# EAGLE board Blackberry_Trackballer_Breakout_Panel_v13 (EAGLE 7.2.0), part 1 of 3
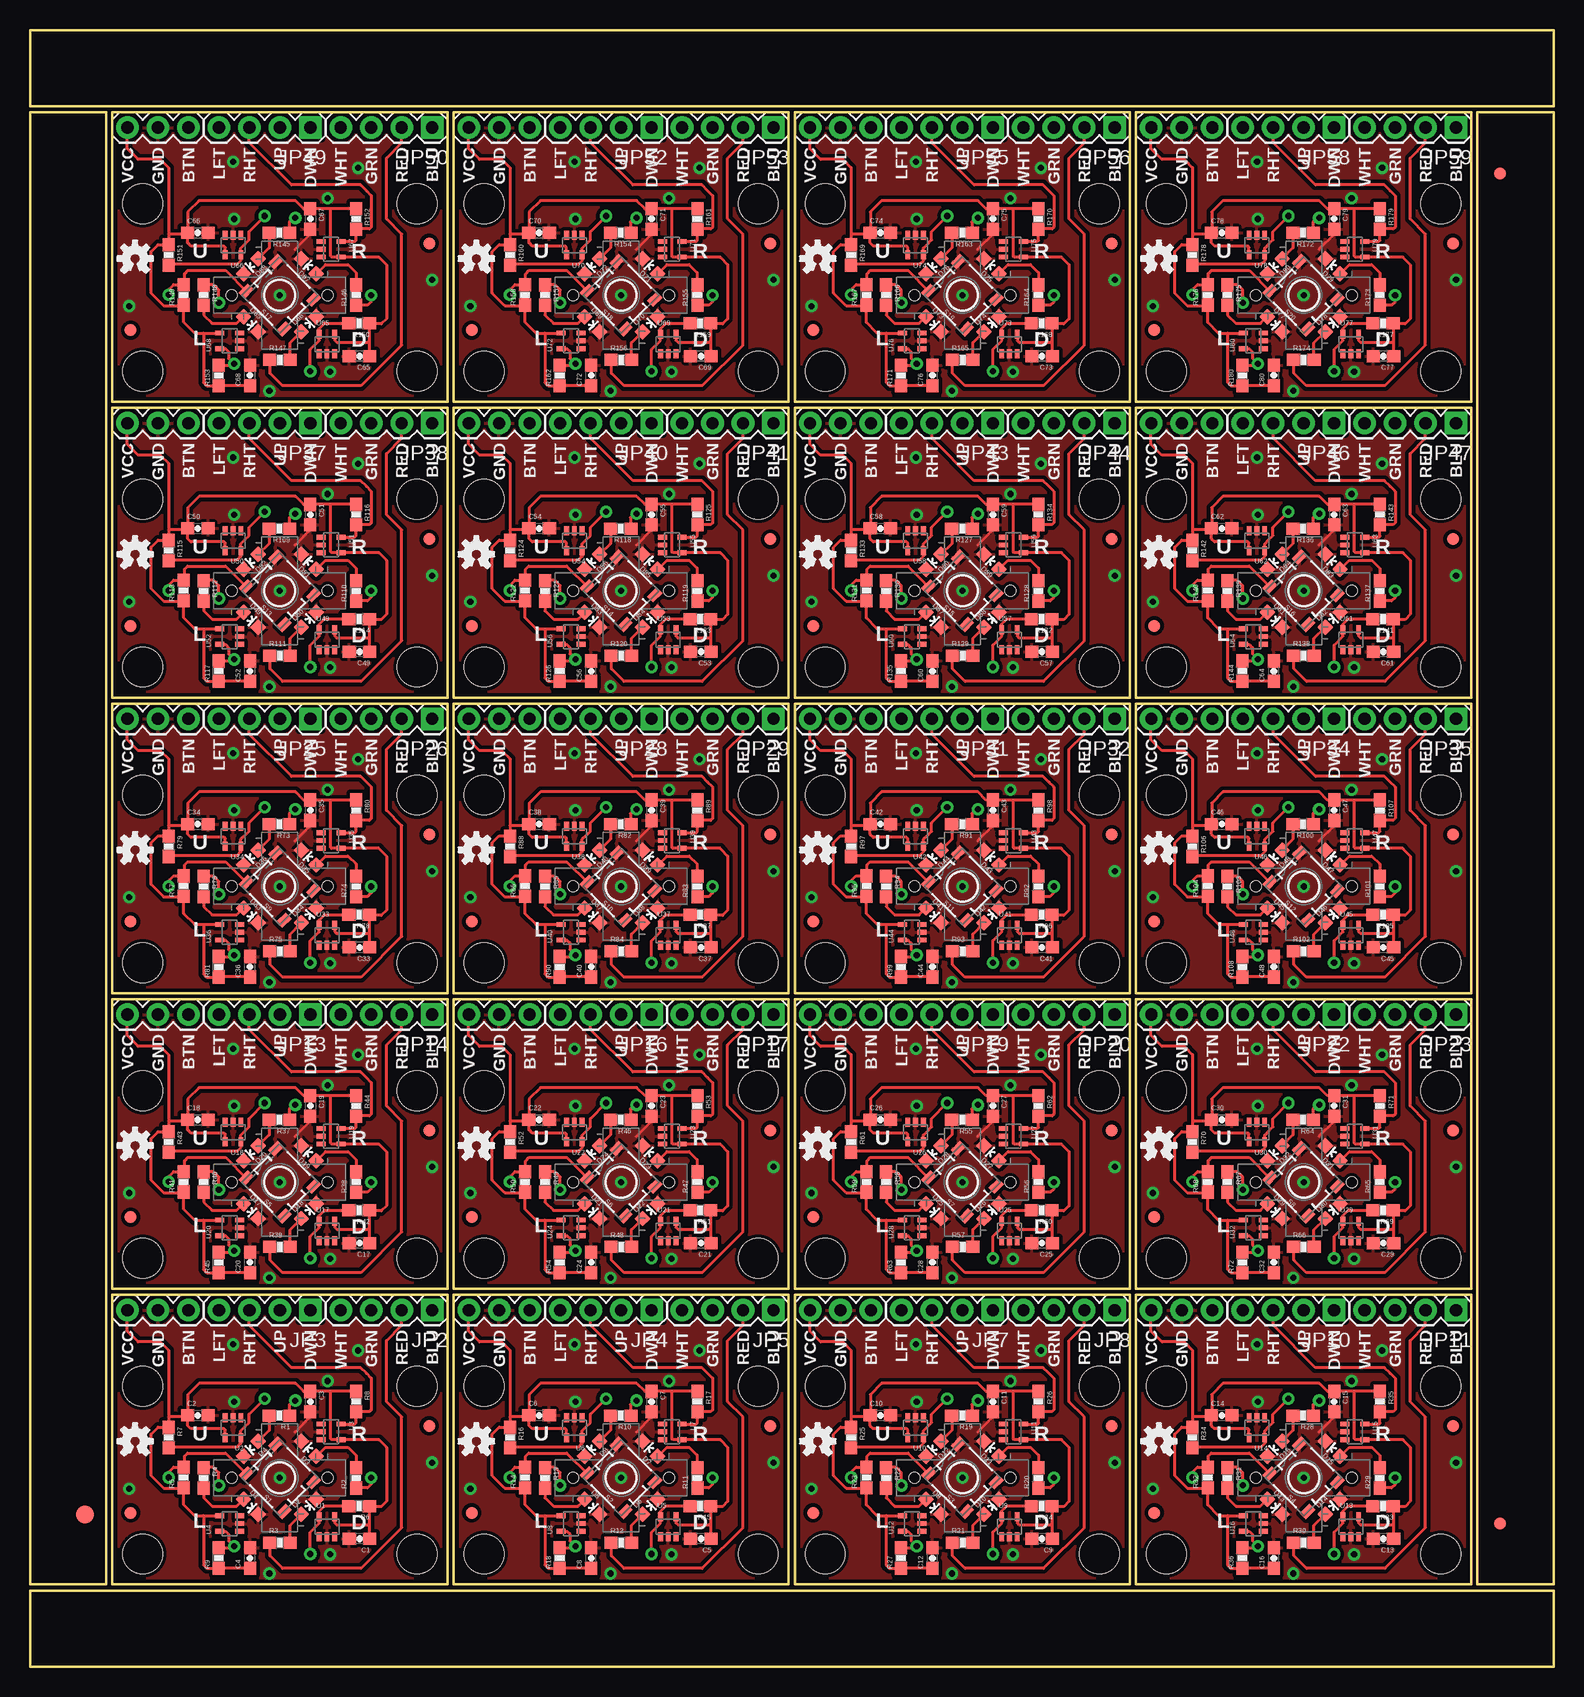
[diagram p0: board, top side]
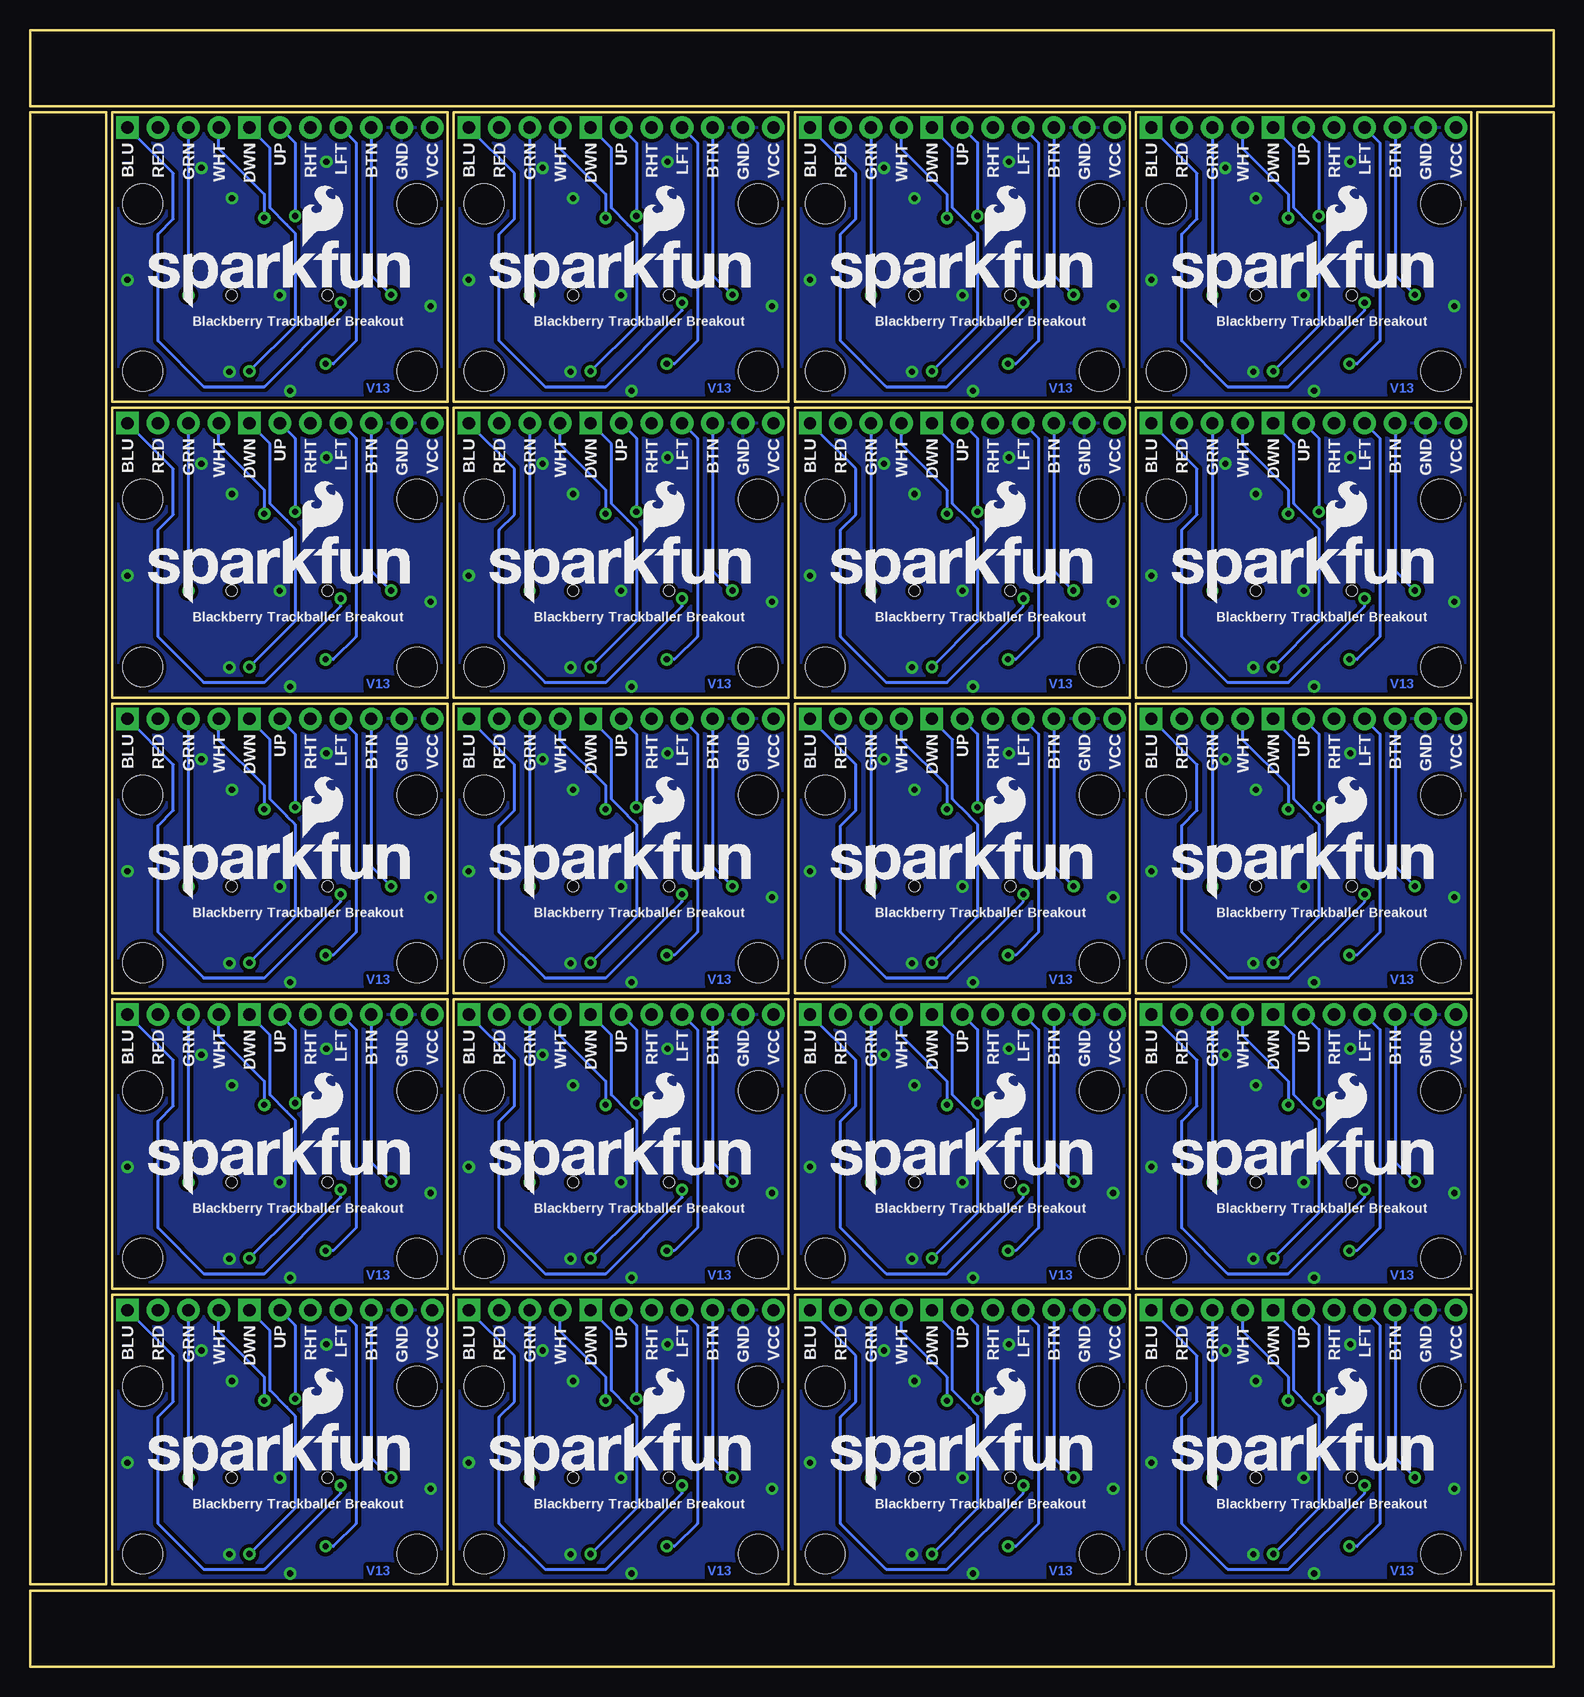
[diagram p1: board, bottom side, seen from below]

Size 127 x 136.4 mm. Coordinates in mm from the lower left corner, seen from the top.
Outline: 34.8,30.99 6.86,30.99 6.86,6.86 34.8,6.86 34.8,30.99
Outline: 63.25,30.99 35.31,30.99 35.31,6.86 63.25,6.86 63.25,30.99
Outline: 91.69,30.99 63.75,30.99 63.75,6.86 91.69,6.86 91.69,30.99
Outline: 120.14,30.99 92.2,30.99 92.2,6.86 120.14,6.86 120.14,30.99
Outline: 34.8,55.63 6.86,55.63 6.86,31.5 34.8,31.5 34.8,55.63
Outline: 63.25,55.63 35.31,55.63 35.31,31.5 63.25,31.5 63.25,55.63
Outline: 91.69,55.63 63.75,55.63 63.75,31.5 91.69,31.5 91.69,55.63
Outline: 120.14,55.63 92.2,55.63 92.2,31.5 120.14,31.5 120.14,55.63
Outline: 34.8,80.26 6.86,80.26 6.86,56.13 34.8,56.13 34.8,80.26
Outline: 63.25,80.26 35.31,80.26 35.31,56.13 63.25,56.13 63.25,80.26
Outline: 91.69,80.26 63.75,80.26 63.75,56.13 91.69,56.13 91.69,80.26
Outline: 120.14,80.26 92.2,80.26 92.2,56.13 120.14,56.13 120.14,80.26
Outline: 34.8,104.9 6.86,104.9 6.86,80.77 34.8,80.77 34.8,104.9
Outline: 63.25,104.9 35.31,104.9 35.31,80.77 63.25,80.77 63.25,104.9
Outline: 91.69,104.9 63.75,104.9 63.75,80.77 91.69,80.77 91.69,104.9
Outline: 120.14,104.9 92.2,104.9 92.2,80.77 120.14,80.77 120.14,104.9
Outline: 34.8,129.54 6.86,129.54 6.86,105.41 34.8,105.41 34.8,129.54
Outline: 63.25,129.54 35.31,129.54 35.31,105.41 63.25,105.41 63.25,129.54
Outline: 91.69,129.54 63.75,129.54 63.75,105.41 91.69,105.41 91.69,129.54
Outline: 120.14,129.54 92.2,129.54 92.2,105.41 120.14,105.41 120.14,129.54
Outline: 6.35,6.86 6.35,129.54 0,129.54 0,6.86 6.35,6.86
Outline: 0,0 127,0 127,6.35 0,6.35 0,0
Outline: 127,6.86 127,129.54 120.65,129.54 120.65,6.86 127,6.86
Outline: 127,136.4 0,136.4 0,130.05 127,130.05 127,136.4
Copper layers (1*16): Top 0.035mm / dielectric 1.5mm / Bottom 0.035mm
Design rules "SparkFun-2-layer": minimum track width 7mil, minimum drill 15mil, track to track 8mil, track to pad 8mil, pad to pad 8mil, via to via 8mil, smd to smd 8mil, copper to edge 8mil, drill to drill 8mil, minimum pad ring 12mil, minimum via ring 10mil, stop-mask expansion 4mil, vias tented up to drill 20mil, thermal gap 10mil
Net classes: 0 default: width 0.203 mm; 1 power: width 0.203 mm

## Footprints (pad centres in the part's own frame; a part is rotated, then mirrored left to right if it is on the bottom)
0603-CAP = smd 1.1 x 1: 1 -0.85,0; 2 0.85,0
LED-0603 = smd 1 x 1: A 0,-0.877; C 0,0.877
FIDUCIAL-1X2 = smd 1 x 1: 1 0,0
FIDUCIAL-1.5X3 = smd 1.5 x 1.5: 1 0,0
1X03 = drill 1.016 pad 1.88: 1 0,0; 2 2.54,0; 3 5.08,0
1X04 = drill 1.016 pad 1.88 square: 1 0,0 | drill 1.016 pad 1.88: 2 2.54,0; 3 5.08,0; 4 7.62,0
0603-RES = smd 1.1 x 1: 1 -0.85,0; 2 0.85,0
TACTILE_SWITCH_SMD-2 = smd 0.7 x 1.1: 1 2.225,1.75; 2 2.225,-1.75; 3 -2.225,-1.75; 4 -2.225,1.75
SC70 = smd 0.4 x 0.75: 1 -0.65,-0.825; 2 0,-0.825; 3 0.65,-0.825; 4 0.65,0.825; 5 -0.65,0.825
STAND-OFF = hole 3.302: 0,0
TRACKBALL = hole 0.9: -4,0; 4,0

## Placement (x,y rotation side)
C1  0.1uF  [0603-CAP]  27.47,10.67 180 top
C2  0.1uF  [0603-CAP]  13.99,20.95 0 top
C3  0.1uF  [0603-CAP]  23.37,22.1 270 top
C4  0.1uF  [0603-CAP]  18.34,9.06 90 top
C5  0.1uF  [0603-CAP]  55.92,10.67 180 top
C6  0.1uF  [0603-CAP]  42.44,20.95 0 top
C7  0.1uF  [0603-CAP]  51.82,22.1 270 top
C8  0.1uF  [0603-CAP]  46.79,9.06 90 top
C9  0.1uF  [0603-CAP]  84.37,10.67 180 top
C10  0.1uF  [0603-CAP]  70.89,20.95 0 top
C11  0.1uF  [0603-CAP]  80.26,22.1 270 top
C12  0.1uF  [0603-CAP]  75.24,9.06 90 top
C13  0.1uF  [0603-CAP]  112.82,10.67 180 top
C14  0.1uF  [0603-CAP]  99.34,20.95 0 top
C15  0.1uF  [0603-CAP]  108.71,22.1 270 top
C16  0.1uF  [0603-CAP]  103.68,9.06 90 top
C17  0.1uF  [0603-CAP]  27.47,35.31 180 top
C18  0.1uF  [0603-CAP]  13.99,45.58 0 top
C19  0.1uF  [0603-CAP]  23.37,46.74 270 top
C20  0.1uF  [0603-CAP]  18.34,33.7 90 top
C21  0.1uF  [0603-CAP]  55.92,35.31 180 top
C22  0.1uF  [0603-CAP]  42.44,45.58 0 top
C23  0.1uF  [0603-CAP]  51.82,46.74 270 top
C24  0.1uF  [0603-CAP]  46.79,33.7 90 top
C25  0.1uF  [0603-CAP]  84.37,35.31 180 top
C26  0.1uF  [0603-CAP]  70.89,45.58 0 top
C27  0.1uF  [0603-CAP]  80.26,46.74 270 top
C28  0.1uF  [0603-CAP]  75.24,33.7 90 top
C29  0.1uF  [0603-CAP]  112.82,35.31 180 top
C30  0.1uF  [0603-CAP]  99.34,45.58 0 top
C31  0.1uF  [0603-CAP]  108.71,46.74 270 top
C32  0.1uF  [0603-CAP]  103.68,33.7 90 top
C33  0.1uF  [0603-CAP]  27.47,59.94 180 top
C34  0.1uF  [0603-CAP]  13.99,70.22 0 top
C35  0.1uF  [0603-CAP]  23.37,71.37 270 top
C36  0.1uF  [0603-CAP]  18.34,58.33 90 top
C37  0.1uF  [0603-CAP]  55.92,59.94 180 top
C38  0.1uF  [0603-CAP]  42.44,70.22 0 top
C39  0.1uF  [0603-CAP]  51.82,71.37 270 top
C40  0.1uF  [0603-CAP]  46.79,58.33 90 top
C41  0.1uF  [0603-CAP]  84.37,59.94 180 top
C42  0.1uF  [0603-CAP]  70.89,70.22 0 top
C43  0.1uF  [0603-CAP]  80.26,71.37 270 top
C44  0.1uF  [0603-CAP]  75.24,58.33 90 top
C45  0.1uF  [0603-CAP]  112.82,59.94 180 top
C46  0.1uF  [0603-CAP]  99.34,70.22 0 top
C47  0.1uF  [0603-CAP]  108.71,71.37 270 top
C48  0.1uF  [0603-CAP]  103.68,58.33 90 top
C49  0.1uF  [0603-CAP]  27.47,84.58 180 top
C50  0.1uF  [0603-CAP]  13.99,94.86 0 top
C51  0.1uF  [0603-CAP]  23.37,96.01 270 top
C52  0.1uF  [0603-CAP]  18.34,82.97 90 top
C53  0.1uF  [0603-CAP]  55.92,84.58 180 top
C54  0.1uF  [0603-CAP]  42.44,94.86 0 top
C55  0.1uF  [0603-CAP]  51.82,96.01 270 top
C56  0.1uF  [0603-CAP]  46.79,82.97 90 top
C57  0.1uF  [0603-CAP]  84.37,84.58 180 top
C58  0.1uF  [0603-CAP]  70.89,94.86 0 top
C59  0.1uF  [0603-CAP]  80.26,96.01 270 top
C60  0.1uF  [0603-CAP]  75.24,82.97 90 top
C61  0.1uF  [0603-CAP]  112.82,84.58 180 top
C62  0.1uF  [0603-CAP]  99.34,94.86 0 top
C63  0.1uF  [0603-CAP]  108.71,96.01 270 top
C64  0.1uF  [0603-CAP]  103.68,82.97 90 top
C65  0.1uF  [0603-CAP]  27.47,109.22 180 top
C66  0.1uF  [0603-CAP]  13.99,119.5 0 top
C67  0.1uF  [0603-CAP]  23.37,120.65 270 top
C68  0.1uF  [0603-CAP]  18.34,107.61 90 top
C69  0.1uF  [0603-CAP]  55.92,109.22 180 top
C70  0.1uF  [0603-CAP]  42.44,119.5 0 top
C71  0.1uF  [0603-CAP]  51.82,120.65 270 top
C72  0.1uF  [0603-CAP]  46.79,107.61 90 top
C73  0.1uF  [0603-CAP]  84.37,109.22 180 top
C74  0.1uF  [0603-CAP]  70.89,119.5 0 top
C75  0.1uF  [0603-CAP]  80.26,120.65 270 top
C76  0.1uF  [0603-CAP]  75.24,107.61 90 top
C77  0.1uF  [0603-CAP]  112.82,109.22 180 top
C78  0.1uF  [0603-CAP]  99.34,119.5 0 top
C79  0.1uF  [0603-CAP]  108.71,120.65 270 top
C80  0.1uF  [0603-CAP]  103.68,107.61 90 top
D1  BLU  [LED-0603]  18.41,13.34 225 top
D2  RED  [LED-0603]  23.24,13.34 315 top
D3  GRN  [LED-0603]  23.24,18.16 45 top
D4  WHT  [LED-0603]  18.41,18.16 135 top
D5  BLU  [LED-0603]  46.86,13.34 225 top
D6  RED  [LED-0603]  51.69,13.34 315 top
D7  GRN  [LED-0603]  51.69,18.16 45 top
D8  WHT  [LED-0603]  46.86,18.16 135 top
D9  BLU  [LED-0603]  75.31,13.34 225 top
D10  RED  [LED-0603]  80.14,13.34 315 top
D11  GRN  [LED-0603]  80.14,18.16 45 top
D12  WHT  [LED-0603]  75.31,18.16 135 top
D13  BLU  [LED-0603]  103.76,13.34 225 top
D14  RED  [LED-0603]  108.58,13.34 315 top
D15  GRN  [LED-0603]  108.58,18.16 45 top
D16  WHT  [LED-0603]  103.76,18.16 135 top
D17  BLU  [LED-0603]  18.41,37.97 225 top
D18  RED  [LED-0603]  23.24,37.97 315 top
D19  GRN  [LED-0603]  23.24,42.8 45 top
D20  WHT  [LED-0603]  18.41,42.8 135 top
D21  BLU  [LED-0603]  46.86,37.97 225 top
D22  RED  [LED-0603]  51.69,37.97 315 top
D23  GRN  [LED-0603]  51.69,42.8 45 top
D24  WHT  [LED-0603]  46.86,42.8 135 top
D25  BLU  [LED-0603]  75.31,37.97 225 top
D26  RED  [LED-0603]  80.14,37.97 315 top
D27  GRN  [LED-0603]  80.14,42.8 45 top
D28  WHT  [LED-0603]  75.31,42.8 135 top
D29  BLU  [LED-0603]  103.76,37.97 225 top
D30  RED  [LED-0603]  108.58,37.97 315 top
D31  GRN  [LED-0603]  108.58,42.8 45 top
D32  WHT  [LED-0603]  103.76,42.8 135 top
D33  BLU  [LED-0603]  18.41,62.61 225 top
D34  RED  [LED-0603]  23.24,62.61 315 top
D35  GRN  [LED-0603]  23.24,67.44 45 top
D36  WHT  [LED-0603]  18.41,67.44 135 top
D37  BLU  [LED-0603]  46.86,62.61 225 top
D38  RED  [LED-0603]  51.69,62.61 315 top
D39  GRN  [LED-0603]  51.69,67.44 45 top
D40  WHT  [LED-0603]  46.86,67.44 135 top
D41  BLU  [LED-0603]  75.31,62.61 225 top
D42  RED  [LED-0603]  80.14,62.61 315 top
D43  GRN  [LED-0603]  80.14,67.44 45 top
D44  WHT  [LED-0603]  75.31,67.44 135 top
D45  BLU  [LED-0603]  103.76,62.61 225 top
D46  RED  [LED-0603]  108.58,62.61 315 top
D47  GRN  [LED-0603]  108.58,67.44 45 top
D48  WHT  [LED-0603]  103.76,67.44 135 top
D49  BLU  [LED-0603]  18.41,87.25 225 top
D50  RED  [LED-0603]  23.24,87.25 315 top
D51  GRN  [LED-0603]  23.24,92.08 45 top
D52  WHT  [LED-0603]  18.41,92.08 135 top
D53  BLU  [LED-0603]  46.86,87.25 225 top
D54  RED  [LED-0603]  51.69,87.25 315 top
D55  GRN  [LED-0603]  51.69,92.08 45 top
D56  WHT  [LED-0603]  46.86,92.08 135 top
D57  BLU  [LED-0603]  75.31,87.25 225 top
D58  RED  [LED-0603]  80.14,87.25 315 top
D59  GRN  [LED-0603]  80.14,92.08 45 top
D60  WHT  [LED-0603]  75.31,92.08 135 top
D61  BLU  [LED-0603]  103.76,87.25 225 top
D62  RED  [LED-0603]  108.58,87.25 315 top
D63  GRN  [LED-0603]  108.58,92.08 45 top
D64  WHT  [LED-0603]  103.76,92.08 135 top
D65  BLU  [LED-0603]  18.41,111.89 225 top
D66  RED  [LED-0603]  23.24,111.89 315 top
D67  GRN  [LED-0603]  23.24,116.71 45 top
D68  WHT  [LED-0603]  18.41,116.71 135 top
D69  BLU  [LED-0603]  46.86,111.89 225 top
D70  RED  [LED-0603]  51.69,111.89 315 top
D71  GRN  [LED-0603]  51.69,116.71 45 top
D72  WHT  [LED-0603]  46.86,116.71 135 top
D73  BLU  [LED-0603]  75.31,111.89 225 top
D74  RED  [LED-0603]  80.14,111.89 315 top
D75  GRN  [LED-0603]  80.14,116.71 45 top
D76  WHT  [LED-0603]  75.31,116.71 135 top
D77  BLU  [LED-0603]  103.76,111.89 225 top
D78  RED  [LED-0603]  108.58,111.89 315 top
D79  GRN  [LED-0603]  108.58,116.71 45 top
D80  WHT  [LED-0603]  103.76,116.71 135 top
E$1  FIDUCIAL1X2  [FIDUCIAL-1X2]  33.27,20.07 180 top
E$2  FIDUCIAL1X2  [FIDUCIAL-1X2]  8.38,12.83 180 top
E$3  FIDUCIAL1X2  [FIDUCIAL-1X2]  61.72,20.07 180 top
E$4  FIDUCIAL1X2  [FIDUCIAL-1X2]  36.83,12.83 180 top
E$5  FIDUCIAL1X2  [FIDUCIAL-1X2]  90.17,20.07 180 top
E$6  FIDUCIAL1X2  [FIDUCIAL-1X2]  65.28,12.83 180 top
E$7  FIDUCIAL1X2  [FIDUCIAL-1X2]  118.62,20.07 180 top
E$8  FIDUCIAL1X2  [FIDUCIAL-1X2]  93.73,12.83 180 top
E$9  FIDUCIAL1X2  [FIDUCIAL-1X2]  33.27,44.7 180 top
E$10  FIDUCIAL1X2  [FIDUCIAL-1X2]  8.38,37.47 180 top
E$11  FIDUCIAL1X2  [FIDUCIAL-1X2]  61.72,44.7 180 top
E$12  FIDUCIAL1X2  [FIDUCIAL-1X2]  36.83,37.47 180 top
E$13  FIDUCIAL1X2  [FIDUCIAL-1X2]  90.17,44.7 180 top
E$14  FIDUCIAL1X2  [FIDUCIAL-1X2]  65.28,37.47 180 top
E$15  FIDUCIAL1X2  [FIDUCIAL-1X2]  118.62,44.7 180 top
E$16  FIDUCIAL1X2  [FIDUCIAL-1X2]  93.73,37.47 180 top
E$17  FIDUCIAL1X2  [FIDUCIAL-1X2]  33.27,69.34 180 top
E$18  FIDUCIAL1X2  [FIDUCIAL-1X2]  8.38,62.1 180 top
E$19  FIDUCIAL1X2  [FIDUCIAL-1X2]  61.72,69.34 180 top
E$20  FIDUCIAL1X2  [FIDUCIAL-1X2]  36.83,62.1 180 top
E$21  FIDUCIAL1X2  [FIDUCIAL-1X2]  90.17,69.34 180 top
E$22  FIDUCIAL1X2  [FIDUCIAL-1X2]  65.28,62.1 180 top
E$23  FIDUCIAL1X2  [FIDUCIAL-1X2]  118.62,69.34 180 top
E$24  FIDUCIAL1X2  [FIDUCIAL-1X2]  93.73,62.1 180 top
E$25  FIDUCIAL1X2  [FIDUCIAL-1X2]  33.27,93.98 180 top
E$26  FIDUCIAL1X2  [FIDUCIAL-1X2]  8.38,86.74 180 top
E$27  FIDUCIAL1X2  [FIDUCIAL-1X2]  61.72,93.98 180 top
E$28  FIDUCIAL1X2  [FIDUCIAL-1X2]  36.83,86.74 180 top
E$29  FIDUCIAL1X2  [FIDUCIAL-1X2]  90.17,93.98 180 top
E$30  FIDUCIAL1X2  [FIDUCIAL-1X2]  65.28,86.74 180 top
E$31  FIDUCIAL1X2  [FIDUCIAL-1X2]  118.62,93.98 180 top
E$32  FIDUCIAL1X2  [FIDUCIAL-1X2]  93.73,86.74 180 top
E$33  FIDUCIAL1X2  [FIDUCIAL-1X2]  33.27,118.62 180 top
E$34  FIDUCIAL1X2  [FIDUCIAL-1X2]  8.38,111.38 180 top
E$35  FIDUCIAL1X2  [FIDUCIAL-1X2]  61.72,118.62 180 top
E$36  FIDUCIAL1X2  [FIDUCIAL-1X2]  36.83,111.38 180 top
E$37  FIDUCIAL1X2  [FIDUCIAL-1X2]  90.17,118.62 180 top
E$38  FIDUCIAL1X2  [FIDUCIAL-1X2]  65.28,111.38 180 top
E$39  FIDUCIAL1X2  [FIDUCIAL-1X2]  118.62,118.62 180 top
E$40  FIDUCIAL1X2  [FIDUCIAL-1X2]  93.73,111.38 180 top
E$41  [FIDUCIAL-1.5X3]  4.57,12.7 0 top
E$44  [FIDUCIAL-1X2]  122.56,11.94 0 top
E$45  [FIDUCIAL-1X2]  122.56,124.46 180 top
JP1  [1X03]  8.13,29.72 0 top
JP2  [1X04]  33.53,29.72 180 top
JP3  [1X04]  23.37,29.72 180 top
JP4  [1X04]  51.82,29.72 180 top
JP5  [1X04]  61.98,29.72 180 top
JP6  [1X03]  36.58,29.72 0 top
JP7  [1X04]  80.26,29.72 180 top
JP8  [1X04]  90.42,29.72 180 top
JP9  [1X03]  65.02,29.72 0 top
JP10  [1X04]  108.71,29.72 180 top
JP11  [1X04]  118.87,29.72 180 top
JP12  [1X03]  93.47,29.72 0 top
JP13  [1X04]  23.37,54.36 180 top
JP14  [1X04]  33.53,54.36 180 top
JP15  [1X03]  8.13,54.36 0 top
JP16  [1X04]  51.82,54.36 180 top
JP17  [1X04]  61.98,54.36 180 top
JP18  [1X03]  36.58,54.36 0 top
JP19  [1X04]  80.26,54.36 180 top
JP20  [1X04]  90.42,54.36 180 top
JP21  [1X03]  65.02,54.36 0 top
JP22  [1X04]  108.71,54.36 180 top
JP23  [1X04]  118.87,54.36 180 top
JP24  [1X03]  93.47,54.36 0 top
JP25  [1X04]  23.37,78.99 180 top
JP26  [1X04]  33.53,78.99 180 top
JP27  [1X03]  8.13,78.99 0 top
JP28  [1X04]  51.82,78.99 180 top
JP29  [1X04]  61.98,78.99 180 top
JP30  [1X03]  36.58,78.99 0 top
JP31  [1X04]  80.26,78.99 180 top
JP32  [1X04]  90.42,78.99 180 top
JP33  [1X03]  65.02,78.99 0 top
JP34  [1X04]  108.71,78.99 180 top
JP35  [1X04]  118.87,78.99 180 top
JP36  [1X03]  93.47,78.99 0 top
JP37  [1X04]  23.37,103.63 180 top
JP38  [1X04]  33.53,103.63 180 top
JP39  [1X03]  8.13,103.63 0 top
JP40  [1X04]  51.82,103.63 180 top
JP41  [1X04]  61.98,103.63 180 top
JP42  [1X03]  36.58,103.63 0 top
JP43  [1X04]  80.26,103.63 180 top
JP44  [1X04]  90.42,103.63 180 top
JP45  [1X03]  65.02,103.63 0 top
JP46  [1X04]  108.71,103.63 180 top
JP47  [1X04]  118.87,103.63 180 top
JP48  [1X03]  93.47,103.63 0 top
JP49  [1X04]  23.37,128.27 180 top
JP50  [1X04]  33.53,128.27 180 top
JP51  [1X03]  8.13,128.27 0 top
JP52  [1X04]  51.82,128.27 180 top
JP53  [1X04]  61.98,128.27 180 top
JP54  [1X03]  36.58,128.27 0 top
JP55  [1X04]  80.26,128.27 180 top
JP56  [1X04]  90.42,128.27 180 top
JP57  [1X03]  65.02,128.27 0 top
JP58  [1X04]  108.71,128.27 180 top
JP59  [1X04]  118.87,128.27 180 top
JP60  [1X03]  93.47,128.27 0 top
LOGO1  SFE_LOGO_NAME_FLAME.2_INCH  [SFE_LOGO_NAME_FLAME_.2]  32.51,14.61 0 bottom
LOGO2  OSHW-LOGOS  [OSHW-LOGO-S]  8.76,18.8 0 top
LOGO3  SFE_LOGO_NAME_FLAME.2_INCH  [SFE_LOGO_NAME_FLAME_.2]  60.96,14.61 0 bottom
LOGO4  OSHW-LOGOS  [OSHW-LOGO-S]  37.21,18.8 0 top
LOGO5  SFE_LOGO_NAME_FLAME.2_INCH  [SFE_LOGO_NAME_FLAME_.2]  89.41,14.61 0 bottom
LOGO6  OSHW-LOGOS  [OSHW-LOGO-S]  65.66,18.8 0 top
LOGO7  SFE_LOGO_NAME_FLAME.2_INCH  [SFE_LOGO_NAME_FLAME_.2]  117.86,14.61 0 bottom
LOGO8  OSHW-LOGOS  [OSHW-LOGO-S]  94.11,18.8 0 top
LOGO9  SFE_LOGO_NAME_FLAME.2_INCH  [SFE_LOGO_NAME_FLAME_.2]  32.51,39.24 0 bottom
LOGO10  OSHW-LOGOS  [OSHW-LOGO-S]  8.76,43.43 0 top
LOGO11  SFE_LOGO_NAME_FLAME.2_INCH  [SFE_LOGO_NAME_FLAME_.2]  60.96,39.24 0 bottom
LOGO12  OSHW-LOGOS  [OSHW-LOGO-S]  37.21,43.43 0 top
LOGO13  SFE_LOGO_NAME_FLAME.2_INCH  [SFE_LOGO_NAME_FLAME_.2]  89.41,39.24 0 bottom
LOGO14  OSHW-LOGOS  [OSHW-LOGO-S]  65.66,43.43 0 top
LOGO15  SFE_LOGO_NAME_FLAME.2_INCH  [SFE_LOGO_NAME_FLAME_.2]  117.86,39.24 0 bottom
LOGO16  OSHW-LOGOS  [OSHW-LOGO-S]  94.11,43.43 0 top
LOGO17  SFE_LOGO_NAME_FLAME.2_INCH  [SFE_LOGO_NAME_FLAME_.2]  32.51,63.88 0 bottom
LOGO18  OSHW-LOGOS  [OSHW-LOGO-S]  8.76,68.07 0 top
LOGO19  SFE_LOGO_NAME_FLAME.2_INCH  [SFE_LOGO_NAME_FLAME_.2]  60.96,63.88 0 bottom
LOGO20  OSHW-LOGOS  [OSHW-LOGO-S]  37.21,68.07 0 top
LOGO21  SFE_LOGO_NAME_FLAME.2_INCH  [SFE_LOGO_NAME_FLAME_.2]  89.41,63.88 0 bottom
LOGO22  OSHW-LOGOS  [OSHW-LOGO-S]  65.66,68.07 0 top
LOGO23  SFE_LOGO_NAME_FLAME.2_INCH  [SFE_LOGO_NAME_FLAME_.2]  117.86,63.88 0 bottom
LOGO24  OSHW-LOGOS  [OSHW-LOGO-S]  94.11,68.07 0 top
LOGO25  SFE_LOGO_NAME_FLAME.2_INCH  [SFE_LOGO_NAME_FLAME_.2]  32.51,88.52 0 bottom
LOGO26  OSHW-LOGOS  [OSHW-LOGO-S]  8.76,92.71 0 top
LOGO27  SFE_LOGO_NAME_FLAME.2_INCH  [SFE_LOGO_NAME_FLAME_.2]  60.96,88.52 0 bottom
LOGO28  OSHW-LOGOS  [OSHW-LOGO-S]  37.21,92.71 0 top
LOGO29  SFE_LOGO_NAME_FLAME.2_INCH  [SFE_LOGO_NAME_FLAME_.2]  89.41,88.52 0 bottom
LOGO30  OSHW-LOGOS  [OSHW-LOGO-S]  65.66,92.71 0 top
LOGO31  SFE_LOGO_NAME_FLAME.2_INCH  [SFE_LOGO_NAME_FLAME_.2]  117.86,88.52 0 bottom
LOGO32  OSHW-LOGOS  [OSHW-LOGO-S]  94.11,92.71 0 top
LOGO33  SFE_LOGO_NAME_FLAME.2_INCH  [SFE_LOGO_NAME_FLAME_.2]  32.51,113.16 0 bottom
LOGO34  OSHW-LOGOS  [OSHW-LOGO-S]  8.76,117.35 0 top
LOGO35  SFE_LOGO_NAME_FLAME.2_INCH  [SFE_LOGO_NAME_FLAME_.2]  60.96,113.16 0 bottom
LOGO36  OSHW-LOGOS  [OSHW-LOGO-S]  37.21,117.35 0 top
LOGO37  SFE_LOGO_NAME_FLAME.2_INCH  [SFE_LOGO_NAME_FLAME_.2]  89.41,113.16 0 bottom
LOGO38  OSHW-LOGOS  [OSHW-LOGO-S]  65.66,117.35 0 top
LOGO39  SFE_LOGO_NAME_FLAME.2_INCH  [SFE_LOGO_NAME_FLAME_.2]  117.86,113.16 0 bottom
LOGO40  OSHW-LOGOS  [OSHW-LOGO-S]  94.11,117.35 0 top
R1  180  [0603-RES]  20.79,20.94 180 top
R2  180  [0603-RES]  27.18,15.75 90 top
R3  180  [0603-RES]  20.84,10.35 0 top
R4  180  [0603-RES]  14.48,15.75 270 top
R5  10K  [0603-RES]  12.83,15.77 90 top
R6  10K  [0603-RES]  27.44,13.4 180 top
R7  10K  [0603-RES]  11.56,19.1 270 top
R8  10K  [0603-RES]  27.18,22.1 270 top
R9  10K  [0603-RES]  15.72,9.06 90 top
R10  180  [0603-RES]  49.24,20.94 180 top
R11  180  [0603-RES]  55.63,15.75 90 top
R12  180  [0603-RES]  49.29,10.35 0 top
R13  180  [0603-RES]  42.93,15.75 270 top
R14  10K  [0603-RES]  41.27,15.77 90 top
R15  10K  [0603-RES]  55.89,13.4 180 top
R16  10K  [0603-RES]  40.01,19.1 270 top
R17  10K  [0603-RES]  55.63,22.1 270 top
R18  10K  [0603-RES]  44.17,9.06 90 top
R19  180  [0603-RES]  77.69,20.94 180 top
R20  180  [0603-RES]  84.07,15.75 90 top
R21  180  [0603-RES]  77.74,10.35 0 top
R22  180  [0603-RES]  71.37,15.75 270 top
R23  10K  [0603-RES]  69.72,15.77 90 top
R24  10K  [0603-RES]  84.33,13.4 180 top
R25  10K  [0603-RES]  68.46,19.1 270 top
R26  10K  [0603-RES]  84.07,22.1 270 top
R27  10K  [0603-RES]  72.61,9.06 90 top
R28  180  [0603-RES]  106.14,20.94 180 top
R29  180  [0603-RES]  112.52,15.75 90 top
R30  180  [0603-RES]  106.18,10.35 0 top
R31  180  [0603-RES]  99.82,15.75 270 top
R32  10K  [0603-RES]  98.17,15.77 90 top
R33  10K  [0603-RES]  112.78,13.4 180 top
R34  10K  [0603-RES]  96.9,19.1 270 top
R35  10K  [0603-RES]  112.52,22.1 270 top
R36  10K  [0603-RES]  101.06,9.06 90 top
R37  180  [0603-RES]  20.79,45.57 180 top
R38  180  [0603-RES]  27.18,40.39 90 top
R39  180  [0603-RES]  20.84,34.99 0 top
R40  180  [0603-RES]  14.48,40.39 270 top
R41  10K  [0603-RES]  12.83,40.41 90 top
R42  10K  [0603-RES]  27.44,38.04 180 top
R43  10K  [0603-RES]  11.56,43.73 270 top
R44  10K  [0603-RES]  27.18,46.74 270 top
R45  10K  [0603-RES]  15.72,33.69 90 top
R46  180  [0603-RES]  49.24,45.57 180 top
R47  180  [0603-RES]  55.63,40.39 90 top
R48  180  [0603-RES]  49.29,34.99 0 top
R49  180  [0603-RES]  42.93,40.39 270 top
R50  10K  [0603-RES]  41.27,40.41 90 top
R51  10K  [0603-RES]  55.89,38.04 180 top
R52  10K  [0603-RES]  40.01,43.73 270 top
R53  10K  [0603-RES]  55.63,46.74 270 top
R54  10K  [0603-RES]  44.17,33.69 90 top
R55  180  [0603-RES]  77.69,45.57 180 top
R56  180  [0603-RES]  84.07,40.39 90 top
R57  180  [0603-RES]  77.74,34.99 0 top
R58  180  [0603-RES]  71.37,40.39 270 top
R59  10K  [0603-RES]  69.72,40.41 90 top
R60  10K  [0603-RES]  84.33,38.04 180 top
R61  10K  [0603-RES]  68.46,43.73 270 top
R62  10K  [0603-RES]  84.07,46.74 270 top
R63  10K  [0603-RES]  72.61,33.69 90 top
R64  180  [0603-RES]  106.14,45.57 180 top
R65  180  [0603-RES]  112.52,40.39 90 top
R66  180  [0603-RES]  106.18,34.99 0 top
R67  180  [0603-RES]  99.82,40.39 270 top
R68  10K  [0603-RES]  98.17,40.41 90 top
R69  10K  [0603-RES]  112.78,38.04 180 top
R70  10K  [0603-RES]  96.9,43.73 270 top
R71  10K  [0603-RES]  112.52,46.74 270 top
R72  10K  [0603-RES]  101.06,33.69 90 top
R73  180  [0603-RES]  20.79,70.21 180 top
R74  180  [0603-RES]  27.18,65.02 90 top
R75  180  [0603-RES]  20.84,59.62 0 top
R76  180  [0603-RES]  14.48,65.02 270 top
R77  10K  [0603-RES]  12.83,65.05 90 top
R78  10K  [0603-RES]  27.44,62.67 180 top
R79  10K  [0603-RES]  11.56,68.37 270 top
R80  10K  [0603-RES]  27.18,71.37 270 top
R81  10K  [0603-RES]  15.72,58.33 90 top
R82  180  [0603-RES]  49.24,70.21 180 top
R83  180  [0603-RES]  55.63,65.02 90 top
R84  180  [0603-RES]  49.29,59.62 0 top
R85  180  [0603-RES]  42.93,65.02 270 top
R86  10K  [0603-RES]  41.27,65.05 90 top
R87  10K  [0603-RES]  55.89,62.67 180 top
R88  10K  [0603-RES]  40.01,68.37 270 top
R89  10K  [0603-RES]  55.63,71.37 270 top
R90  10K  [0603-RES]  44.17,58.33 90 top
R91  180  [0603-RES]  77.69,70.21 180 top
R92  180  [0603-RES]  84.07,65.02 90 top
R93  180  [0603-RES]  77.74,59.62 0 top
R94  180  [0603-RES]  71.37,65.02 270 top
R95  10K  [0603-RES]  69.72,65.05 90 top
R96  10K  [0603-RES]  84.33,62.67 180 top
R97  10K  [0603-RES]  68.46,68.37 270 top
R98  10K  [0603-RES]  84.07,71.37 270 top
R99  10K  [0603-RES]  72.61,58.33 90 top
R100  180  [0603-RES]  106.14,70.21 180 top
R101  180  [0603-RES]  112.52,65.02 90 top
R102  180  [0603-RES]  106.18,59.62 0 top
R103  180  [0603-RES]  99.82,65.02 270 top
R104  10K  [0603-RES]  98.17,65.05 90 top
R105  10K  [0603-RES]  112.78,62.67 180 top
R106  10K  [0603-RES]  96.9,68.37 270 top
R107  10K  [0603-RES]  112.52,71.37 270 top
R108  10K  [0603-RES]  101.06,58.33 90 top
R109  180  [0603-RES]  20.79,94.85 180 top
R110  180  [0603-RES]  27.18,89.66 90 top
R111  180  [0603-RES]  20.84,84.26 0 top
R112  180  [0603-RES]  14.48,89.66 270 top
R113  10K  [0603-RES]  12.83,89.69 90 top
R114  10K  [0603-RES]  27.44,87.31 180 top
R115  10K  [0603-RES]  11.56,93.01 270 top
R116  10K  [0603-RES]  27.18,96.01 270 top
R117  10K  [0603-RES]  15.72,82.97 90 top
R118  180  [0603-RES]  49.24,94.85 180 top
R119  180  [0603-RES]  55.63,89.66 90 top
R120  180  [0603-RES]  49.29,84.26 0 top
R121  180  [0603-RES]  42.93,89.66 270 top
R122  10K  [0603-RES]  41.27,89.69 90 top
R123  10K  [0603-RES]  55.89,87.31 180 top
R124  10K  [0603-RES]  40.01,93.01 270 top
R125  10K  [0603-RES]  55.63,96.01 270 top
R126  10K  [0603-RES]  44.17,82.97 90 top
R127  180  [0603-RES]  77.69,94.85 180 top
R128  180  [0603-RES]  84.07,89.66 90 top
R129  180  [0603-RES]  77.74,84.26 0 top
R130  180  [0603-RES]  71.37,89.66 270 top
R131  10K  [0603-RES]  69.72,89.69 90 top
R132  10K  [0603-RES]  84.33,87.31 180 top
R133  10K  [0603-RES]  68.46,93.01 270 top
R134  10K  [0603-RES]  84.07,96.01 270 top
R135  10K  [0603-RES]  72.61,82.97 90 top
R136  180  [0603-RES]  106.14,94.85 180 top
R137  180  [0603-RES]  112.52,89.66 90 top
R138  180  [0603-RES]  106.18,84.26 0 top
R139  180  [0603-RES]  99.82,89.66 270 top
R140  10K  [0603-RES]  98.17,89.69 90 top
R141  10K  [0603-RES]  112.78,87.31 180 top
R142  10K  [0603-RES]  96.9,93.01 270 top
R143  10K  [0603-RES]  112.52,96.01 270 top
R144  10K  [0603-RES]  101.06,82.97 90 top
R145  180  [0603-RES]  20.79,119.49 180 top
R146  180  [0603-RES]  27.18,114.3 90 top
R147  180  [0603-RES]  20.84,108.9 0 top
R148  180  [0603-RES]  14.48,114.3 270 top
R149  10K  [0603-RES]  12.83,114.33 90 top
R150  10K  [0603-RES]  27.44,111.95 180 top
R151  10K  [0603-RES]  11.56,117.65 270 top
R152  10K  [0603-RES]  27.18,120.65 270 top
R153  10K  [0603-RES]  15.72,107.61 90 top
R154  180  [0603-RES]  49.24,119.49 180 top
R155  180  [0603-RES]  55.63,114.3 90 top
R156  180  [0603-RES]  49.29,108.9 0 top
R157  180  [0603-RES]  42.93,114.3 270 top
R158  10K  [0603-RES]  41.27,114.33 90 top
R159  10K  [0603-RES]  55.89,111.95 180 top
R160  10K  [0603-RES]  40.01,117.65 270 top
R161  10K  [0603-RES]  55.63,120.65 270 top
R162  10K  [0603-RES]  44.17,107.61 90 top
R163  180  [0603-RES]  77.69,119.49 180 top
R164  180  [0603-RES]  84.07,114.3 90 top
R165  180  [0603-RES]  77.74,108.9 0 top
R166  180  [0603-RES]  71.37,114.3 270 top
R167  10K  [0603-RES]  69.72,114.33 90 top
R168  10K  [0603-RES]  84.33,111.95 180 top
R169  10K  [0603-RES]  68.46,117.65 270 top
R170  10K  [0603-RES]  84.07,120.65 270 top
R171  10K  [0603-RES]  72.61,107.61 90 top
R172  180  [0603-RES]  106.14,119.49 180 top
R173  180  [0603-RES]  112.52,114.3 90 top
R174  180  [0603-RES]  106.18,108.9 0 top
R175  180  [0603-RES]  99.82,114.3 270 top
R176  10K  [0603-RES]  98.17,114.33 90 top
R177  10K  [0603-RES]  112.78,111.95 180 top
R178  10K  [0603-RES]  96.9,117.65 270 top
R179  10K  [0603-RES]  112.52,120.65 270 top
R180  10K  [0603-RES]  101.06,107.61 90 top
S1  SWITCH-MOMENTARY-2SMD-2  [TACTILE_SWITCH_SMD-2]  20.83,15.75 135 top
S2  SWITCH-MOMENTARY-2SMD-2  [TACTILE_SWITCH_SMD-2]  49.28,15.75 135 top
S3  SWITCH-MOMENTARY-2SMD-2  [TACTILE_SWITCH_SMD-2]  77.72,15.75 135 top
S4  SWITCH-MOMENTARY-2SMD-2  [TACTILE_SWITCH_SMD-2]  106.17,15.75 135 top
S5  SWITCH-MOMENTARY-2SMD-2  [TACTILE_SWITCH_SMD-2]  20.83,40.39 135 top
S6  SWITCH-MOMENTARY-2SMD-2  [TACTILE_SWITCH_SMD-2]  49.28,40.39 135 top
S7  SWITCH-MOMENTARY-2SMD-2  [TACTILE_SWITCH_SMD-2]  77.72,40.39 135 top
S8  SWITCH-MOMENTARY-2SMD-2  [TACTILE_SWITCH_SMD-2]  106.17,40.39 135 top
S9  SWITCH-MOMENTARY-2SMD-2  [TACTILE_SWITCH_SMD-2]  20.83,65.02 135 top
S10  SWITCH-MOMENTARY-2SMD-2  [TACTILE_SWITCH_SMD-2]  49.28,65.02 135 top
S11  SWITCH-MOMENTARY-2SMD-2  [TACTILE_SWITCH_SMD-2]  77.72,65.02 135 top
S12  SWITCH-MOMENTARY-2SMD-2  [TACTILE_SWITCH_SMD-2]  106.17,65.02 135 top
S13  SWITCH-MOMENTARY-2SMD-2  [TACTILE_SWITCH_SMD-2]  20.83,89.66 135 top
S14  SWITCH-MOMENTARY-2SMD-2  [TACTILE_SWITCH_SMD-2]  49.28,89.66 135 top
S15  SWITCH-MOMENTARY-2SMD-2  [TACTILE_SWITCH_SMD-2]  77.72,89.66 135 top
S16  SWITCH-MOMENTARY-2SMD-2  [TACTILE_SWITCH_SMD-2]  106.17,89.66 135 top
S17  SWITCH-MOMENTARY-2SMD-2  [TACTILE_SWITCH_SMD-2]  20.83,114.3 135 top
S18  SWITCH-MOMENTARY-2SMD-2  [TACTILE_SWITCH_SMD-2]  49.28,114.3 135 top
S19  SWITCH-MOMENTARY-2SMD-2  [TACTILE_SWITCH_SMD-2]  77.72,114.3 135 top
S20  SWITCH-MOMENTARY-2SMD-2  [TACTILE_SWITCH_SMD-2]  106.17,114.3 135 top
U1  HALL-EFFECTSMD  [SC70]  24.75,11.68 0 top
U2  HALL-EFFECTSMD  [SC70]  16.93,19.92 180 top
U3  HALL-EFFECTSMD  [SC70]  25.09,19.57 270 top
U4  HALL-EFFECTSMD  [SC70]  16.64,11.94 90 top
U5  HALL-EFFECTSMD  [SC70]  53.2,11.68 0 top
U6  HALL-EFFECTSMD  [SC70]  45.38,19.92 180 top
U7  HALL-EFFECTSMD  [SC70]  53.54,19.57 270 top
U8  HALL-EFFECTSMD  [SC70]  45.09,11.94 90 top
U9  HALL-EFFECTSMD  [SC70]  81.65,11.68 0 top
U10  HALL-EFFECTSMD  [SC70]  73.82,19.92 180 top
U11  HALL-EFFECTSMD  [SC70]  81.99,19.57 270 top
U12  HALL-EFFECTSMD  [SC70]  73.54,11.94 90 top
U13  HALL-EFFECTSMD  [SC70]  110.1,11.68 0 top
U14  HALL-EFFECTSMD  [SC70]  102.27,19.92 180 top
U15  HALL-EFFECTSMD  [SC70]  110.44,19.57 270 top
U16  HALL-EFFECTSMD  [SC70]  101.99,11.94 90 top
U17  HALL-EFFECTSMD  [SC70]  24.75,36.32 0 top
U18  HALL-EFFECTSMD  [SC70]  16.93,44.56 180 top
U19  HALL-EFFECTSMD  [SC70]  25.09,44.21 270 top
U20  HALL-EFFECTSMD  [SC70]  16.64,36.58 90 top
U21  HALL-EFFECTSMD  [SC70]  53.2,36.32 0 top
U22  HALL-EFFECTSMD  [SC70]  45.38,44.56 180 top
U23  HALL-EFFECTSMD  [SC70]  53.54,44.21 270 top
U24  HALL-EFFECTSMD  [SC70]  45.09,36.58 90 top
U25  HALL-EFFECTSMD  [SC70]  81.65,36.32 0 top
U26  HALL-EFFECTSMD  [SC70]  73.82,44.56 180 top
U27  HALL-EFFECTSMD  [SC70]  81.99,44.21 270 top
U28  HALL-EFFECTSMD  [SC70]  73.54,36.58 90 top
U29  HALL-EFFECTSMD  [SC70]  110.1,36.32 0 top
U30  HALL-EFFECTSMD  [SC70]  102.27,44.56 180 top
U31  HALL-EFFECTSMD  [SC70]  110.44,44.21 270 top
U32  HALL-EFFECTSMD  [SC70]  101.99,36.58 90 top
U33  HALL-EFFECTSMD  [SC70]  24.75,60.95 0 top
U34  HALL-EFFECTSMD  [SC70]  16.93,69.2 180 top
U35  HALL-EFFECTSMD  [SC70]  25.09,68.85 270 top
U36  HALL-EFFECTSMD  [SC70]  16.64,61.21 90 top
U37  HALL-EFFECTSMD  [SC70]  53.2,60.95 0 top
U38  HALL-EFFECTSMD  [SC70]  45.38,69.2 180 top
U39  HALL-EFFECTSMD  [SC70]  53.54,68.85 270 top
U40  HALL-EFFECTSMD  [SC70]  45.09,61.21 90 top
U41  HALL-EFFECTSMD  [SC70]  81.65,60.95 0 top
U42  HALL-EFFECTSMD  [SC70]  73.82,69.2 180 top
U43  HALL-EFFECTSMD  [SC70]  81.99,68.85 270 top
U44  HALL-EFFECTSMD  [SC70]  73.54,61.21 90 top
U45  HALL-EFFECTSMD  [SC70]  110.1,60.95 0 top
U46  HALL-EFFECTSMD  [SC70]  102.27,69.2 180 top
U47  HALL-EFFECTSMD  [SC70]  110.44,68.85 270 top
U48  HALL-EFFECTSMD  [SC70]  101.99,61.21 90 top
U49  HALL-EFFECTSMD  [SC70]  24.75,85.59 0 top
U50  HALL-EFFECTSMD  [SC70]  16.93,93.84 180 top
U51  HALL-EFFECTSMD  [SC70]  25.09,93.49 270 top
U52  HALL-EFFECTSMD  [SC70]  16.64,85.85 90 top
U53  HALL-EFFECTSMD  [SC70]  53.2,85.59 0 top
U54  HALL-EFFECTSMD  [SC70]  45.38,93.84 180 top
U55  HALL-EFFECTSMD  [SC70]  53.54,93.49 270 top
U56  HALL-EFFECTSMD  [SC70]  45.09,85.85 90 top
U57  HALL-EFFECTSMD  [SC70]  81.65,85.59 0 top
U58  HALL-EFFECTSMD  [SC70]  73.82,93.84 180 top
U59  HALL-EFFECTSMD  [SC70]  81.99,93.49 270 top
U60  HALL-EFFECTSMD  [SC70]  73.54,85.85 90 top
U61  HALL-EFFECTSMD  [SC70]  110.1,85.59 0 top
U62  HALL-EFFECTSMD  [SC70]  102.27,93.84 180 top
U63  HALL-EFFECTSMD  [SC70]  110.44,93.49 270 top
U64  HALL-EFFECTSMD  [SC70]  101.99,85.85 90 top
U65  HALL-EFFECTSMD  [SC70]  24.75,110.23 0 top
U66  HALL-EFFECTSMD  [SC70]  16.93,118.48 180 top
U67  HALL-EFFECTSMD  [SC70]  25.09,118.13 270 top
U68  HALL-EFFECTSMD  [SC70]  16.64,110.49 90 top
U69  HALL-EFFECTSMD  [SC70]  53.2,110.23 0 top
U70  HALL-EFFECTSMD  [SC70]  45.38,118.48 180 top
U71  HALL-EFFECTSMD  [SC70]  53.54,118.13 270 top
U72  HALL-EFFECTSMD  [SC70]  45.09,110.49 90 top
U73  HALL-EFFECTSMD  [SC70]  81.65,110.23 0 top
U74  HALL-EFFECTSMD  [SC70]  73.82,118.48 180 top
U75  HALL-EFFECTSMD  [SC70]  81.99,118.13 270 top
U76  HALL-EFFECTSMD  [SC70]  73.54,110.49 90 top
U77  HALL-EFFECTSMD  [SC70]  110.1,110.23 0 top
U78  HALL-EFFECTSMD  [SC70]  102.27,118.48 180 top
U79  HALL-EFFECTSMD  [SC70]  110.44,118.13 270 top
U80  HALL-EFFECTSMD  [SC70]  101.99,110.49 90 top
U$1  STAND-OFF  [STAND-OFF]  9.4,23.37 0 top
U$2  STAND-OFF  [STAND-OFF]  37.85,23.37 0 top
U$3  TRACKBALLMECH  [TRACKBALL]  20.83,15.75 0 top
U$4  STAND-OFF  [STAND-OFF]  60.71,23.37 0 top
U$5  STAND-OFF  [STAND-OFF]  37.85,9.4 0 top
U$6  STAND-OFF  [STAND-OFF]  60.71,9.4 0 top
U$7  TRACKBALLMECH  [TRACKBALL]  49.28,15.75 0 top
U$8  STAND-OFF  [STAND-OFF]  32.26,23.37 0 top
U$9  STAND-OFF  [STAND-OFF]  66.29,23.37 0 top
U$10  STAND-OFF  [STAND-OFF]  89.15,23.37 0 top
U$11  STAND-OFF  [STAND-OFF]  9.4,9.4 0 top
U$12  STAND-OFF  [STAND-OFF]  66.29,9.4 0 top
U$13  STAND-OFF  [STAND-OFF]  89.15,9.4 0 top
U$14  STAND-OFF  [STAND-OFF]  32.26,9.4 0 top
U$15  TRACKBALLMECH  [TRACKBALL]  77.72,15.75 0 top
U$16  STAND-OFF  [STAND-OFF]  94.74,23.37 0 top
U$17  STAND-OFF  [STAND-OFF]  117.6,23.37 0 top
U$18  STAND-OFF  [STAND-OFF]  94.74,9.4 0 top
U$19  STAND-OFF  [STAND-OFF]  117.6,9.4 0 top
U$20  TRACKBALLMECH  [TRACKBALL]  106.17,15.75 0 top
U$21  STAND-OFF  [STAND-OFF]  9.4,48.01 0 top
U$22  STAND-OFF  [STAND-OFF]  32.26,48.01 0 top
U$23  STAND-OFF  [STAND-OFF]  9.4,34.04 0 top
U$24  STAND-OFF  [STAND-OFF]  32.26,34.04 0 top
U$25  TRACKBALLMECH  [TRACKBALL]  20.83,40.39 0 top
U$26  STAND-OFF  [STAND-OFF]  37.85,48.01 0 top
U$27  STAND-OFF  [STAND-OFF]  60.71,48.01 0 top
U$28  STAND-OFF  [STAND-OFF]  37.85,34.04 0 top
U$29  STAND-OFF  [STAND-OFF]  60.71,34.04 0 top
U$30  TRACKBALLMECH  [TRACKBALL]  49.28,40.39 0 top
U$31  STAND-OFF  [STAND-OFF]  66.29,48.01 0 top
U$32  STAND-OFF  [STAND-OFF]  89.15,48.01 0 top
U$33  STAND-OFF  [STAND-OFF]  66.29,34.04 0 top
U$34  STAND-OFF  [STAND-OFF]  89.15,34.04 0 top
U$35  TRACKBALLMECH  [TRACKBALL]  77.72,40.39 0 top
U$36  STAND-OFF  [STAND-OFF]  94.74,48.01 0 top
U$37  STAND-OFF  [STAND-OFF]  117.6,48.01 0 top
U$38  STAND-OFF  [STAND-OFF]  94.74,34.04 0 top
U$39  STAND-OFF  [STAND-OFF]  117.6,34.04 0 top
U$40  TRACKBALLMECH  [TRACKBALL]  106.17,40.39 0 top
U$41  STAND-OFF  [STAND-OFF]  9.4,72.64 0 top
U$42  STAND-OFF  [STAND-OFF]  32.26,72.64 0 top
U$43  STAND-OFF  [STAND-OFF]  9.4,58.67 0 top
U$44  STAND-OFF  [STAND-OFF]  32.26,58.67 0 top
U$45  TRACKBALLMECH  [TRACKBALL]  20.83,65.02 0 top
U$46  STAND-OFF  [STAND-OFF]  37.85,72.64 0 top
U$47  STAND-OFF  [STAND-OFF]  60.71,72.64 0 top
U$48  STAND-OFF  [STAND-OFF]  37.85,58.67 0 top
U$49  STAND-OFF  [STAND-OFF]  60.71,58.67 0 top
U$50  TRACKBALLMECH  [TRACKBALL]  49.28,65.02 0 top
U$51  STAND-OFF  [STAND-OFF]  66.29,72.64 0 top
U$52  STAND-OFF  [STAND-OFF]  89.15,72.64 0 top
U$53  STAND-OFF  [STAND-OFF]  66.29,58.67 0 top
U$54  STAND-OFF  [STAND-OFF]  89.15,58.67 0 top
U$55  TRACKBALLMECH  [TRACKBALL]  77.72,65.02 0 top
U$56  STAND-OFF  [STAND-OFF]  94.74,72.64 0 top
U$57  STAND-OFF  [STAND-OFF]  117.6,72.64 0 top
U$58  STAND-OFF  [STAND-OFF]  94.74,58.67 0 top
U$59  STAND-OFF  [STAND-OFF]  117.6,58.67 0 top
U$60  TRACKBALLMECH  [TRACKBALL]  106.17,65.02 0 top
U$61  STAND-OFF  [STAND-OFF]  9.4,97.28 0 top
U$62  STAND-OFF  [STAND-OFF]  32.26,97.28 0 top
U$63  STAND-OFF  [STAND-OFF]  9.4,83.31 0 top
U$64  STAND-OFF  [STAND-OFF]  32.26,83.31 0 top
U$65  TRACKBALLMECH  [TRACKBALL]  20.83,89.66 0 top
U$66  STAND-OFF  [STAND-OFF]  37.85,97.28 0 top
U$67  STAND-OFF  [STAND-OFF]  60.71,97.28 0 top
U$68  STAND-OFF  [STAND-OFF]  37.85,83.31 0 top
U$69  STAND-OFF  [STAND-OFF]  60.71,83.31 0 top
U$70  TRACKBALLMECH  [TRACKBALL]  49.28,89.66 0 top
U$71  STAND-OFF  [STAND-OFF]  66.29,97.28 0 top
U$72  STAND-OFF  [STAND-OFF]  89.15,97.28 0 top
U$73  STAND-OFF  [STAND-OFF]  66.29,83.31 0 top
U$74  STAND-OFF  [STAND-OFF]  89.15,83.31 0 top
U$75  TRACKBALLMECH  [TRACKBALL]  77.72,89.66 0 top
U$76  STAND-OFF  [STAND-OFF]  94.74,97.28 0 top
U$77  STAND-OFF  [STAND-OFF]  117.6,97.28 0 top
U$78  STAND-OFF  [STAND-OFF]  94.74,83.31 0 top
U$79  STAND-OFF  [STAND-OFF]  117.6,83.31 0 top
U$80  TRACKBALLMECH  [TRACKBALL]  106.17,89.66 0 top
U$81  STAND-OFF  [STAND-OFF]  9.4,121.92 0 top
U$82  STAND-OFF  [STAND-OFF]  32.26,121.92 0 top
U$83  STAND-OFF  [STAND-OFF]  9.4,107.95 0 top
U$84  STAND-OFF  [STAND-OFF]  32.26,107.95 0 top
U$85  TRACKBALLMECH  [TRACKBALL]  20.83,114.3 0 top
U$86  STAND-OFF  [STAND-OFF]  37.85,121.92 0 top
U$87  STAND-OFF  [STAND-OFF]  60.71,121.92 0 top
U$88  STAND-OFF  [STAND-OFF]  37.85,107.95 0 top
U$89  STAND-OFF  [STAND-OFF]  60.71,107.95 0 top
U$90  TRACKBALLMECH  [TRACKBALL]  49.28,114.3 0 top
U$91  STAND-OFF  [STAND-OFF]  66.29,121.92 0 top
U$92  STAND-OFF  [STAND-OFF]  89.15,121.92 0 top
U$93  STAND-OFF  [STAND-OFF]  66.29,107.95 0 top
U$94  STAND-OFF  [STAND-OFF]  89.15,107.95 0 top
U$95  TRACKBALLMECH  [TRACKBALL]  77.72,114.3 0 top
U$96  STAND-OFF  [STAND-OFF]  94.74,121.92 0 top
U$97  STAND-OFF  [STAND-OFF]  117.6,121.92 0 top
U$98  STAND-OFF  [STAND-OFF]  94.74,107.95 0 top
U$99  STAND-OFF  [STAND-OFF]  117.6,107.95 0 top
U$100  TRACKBALLMECH  [TRACKBALL]  106.17,114.3 0 top

## Library data of the parts
C1-C80 = SparkFun-Capacitors; PROD_ID: CAP-00810
D1 D5 D9 D13 D17 D21 D25 D29 D33 D37 D41 D45 D49 D53 D57 D61 D65 D69 D73 D77 = SparkFun-LED; PROD_ID: DIO-08575
D2 D6 D10 D14 D18 D22 D26 D30 D34 D38 D42 D46 D50 D54 D58 D62 D66 D70 D74 D78 = SparkFun-LED; PROD_ID: DIO-00819
D3 D7 D11 D15 D19 D23 D27 D31 D35 D39 D43 D47 D51 D55 D59 D63 D67 D71 D75 D79 = SparkFun-LED; PROD_ID: DIO-00821
D4 D8 D12 D16 D20 D24 D28 D32 D36 D40 D44 D48 D52 D56 D60 D64 D68 D72 D76 D80 = SparkFun-LED; PROD_ID: DIO-09004
E$1-E$40 JP1-JP60 U$1 U$2 U$4-U$6 U$8-U$14 U$16-U$19 U$21-U$24 U$26-U$29 U$31-U$34 U$36-U$39 U$41-U$44 U$46-U$49 U$51-U$54 U$56-U$59 U$61-U$64 U$66-U$69 U$71-U$74 U$76-U$79 U$81-U$84 U$86-U$89 U$91-U$94 U$96-U$99 = SparkFun
E$41 = SparkFun-Retired
E$44 E$45 LOGO1-LOGO40 = SparkFun-Aesthetics
R1-R4 R10-R13 R19-R22 R28-R31 R37-R40 R46-R49 R55-R58 R64-R67 R73-R76 R82-R85 R91-R94 R100-R103 R109-R112 R118-R121 R127-R130 R136-R139 R145-R148 R154-R157 R163-R166 R172-R175 = SparkFun-Resistors; PROD_ID: RES-08788
R5-R9 R14-R18 R23-R27 R32-R36 R41-R45 R50-R54 R59-R63 R68-R72 R77-R81 R86-R90 R95-R99 R104-R108 R113-R117 R122-R126 R131-R135 R140-R144 R149-R153 R158-R162 R167-R171 R176-R180 = SparkFun-Resistors; PROD_ID: RES-00824
S1-S20 = SparkFun-Electromechanical; PROD_ID: SWCH-09213
U1-U80 = SparkFun-Sensors; PROD_ID: IC-09214
U$3 U$7 U$15 U$20 U$25 U$30 U$35 U$40 U$45 U$50 U$55 U$60 U$65 U$70 U$75 U$80 U$85 U$90 U$95 U$100 = SparkFun-Electromechanical; PROD_ID: COMP-09237

## Nets
BLU: JP2.1 R4.1
BLU1: JP5.1 R13.1
BLU2: JP8.1 R22.1
BLU3: JP11.1 R31.1
BLU4: JP14.1 R40.1
BLU5: JP17.1 R49.1
BLU6: JP20.1 R58.1
BLU7: JP23.1 R67.1
BLU8: JP26.1 R76.1
BLU9: JP29.1 R85.1
BLU10: JP32.1 R94.1
BLU11: JP35.1 R103.1
BLU12: JP38.1 R112.1
BLU13: JP41.1 R121.1
BLU14: JP44.1 R130.1
BLU15: JP47.1 R139.1
BLU16: JP50.1 R148.1
BLU17: JP53.1 R157.1
BLU18: JP56.1 R166.1
BLU19: JP59.1 R175.1
BTN: JP1.3 R5.2 S1.1
BTN1: JP6.3 R14.2 S2.1
BTN2: JP9.3 R23.2 S3.1
BTN3: JP12.3 R32.2 S4.1
BTN4: JP15.3 R41.2 S5.1
BTN5: JP18.3 R50.2 S6.1
BTN6: JP21.3 R59.2 S7.1
BTN7: JP24.3 R68.2 S8.1
BTN8: JP27.3 R77.2 S9.1
BTN9: JP30.3 R86.2 S10.1
BTN10: JP33.3 R95.2 S11.1
BTN11: JP36.3 R104.2 S12.1
BTN12: JP39.3 R113.2 S13.1
BTN13: JP42.3 R122.2 S14.1
BTN14: JP45.3 R131.2 S15.1
BTN15: JP48.3 R140.2 S16.1
BTN16: JP51.3 R149.2 S17.1
BTN17: JP54.3 R158.2 S18.1
BTN18: JP57.3 R167.2 S19.1
BTN19: JP60.3 R176.2 S20.1
DWN: JP3.2 R7.2 U2.5
DWN1: JP4.2 R16.2 U6.5
DWN2: JP7.2 R25.2 U10.5
DWN3: JP10.2 R34.2 U14.5
DWN4: JP13.2 R43.2 U18.5
DWN5: JP16.2 R52.2 U22.5
DWN6: JP19.2 R61.2 U26.5
DWN7: JP22.2 R70.2 U30.5
DWN8: JP25.2 R79.2 U34.5
DWN9: JP28.2 R88.2 U38.5
DWN10: JP31.2 R97.2 U42.5
DWN11: JP34.2 R106.2 U46.5
DWN12: JP37.2 R115.2 U50.5
DWN13: JP40.2 R124.2 U54.5
DWN14: JP43.2 R133.2 U58.5
DWN15: JP46.2 R142.2 U62.5
DWN16: JP49.2 R151.2 U66.5
DWN17: JP52.2 R160.2 U70.5
DWN18: JP55.2 R169.2 U74.5
DWN19: JP58.2 R178.2 U78.5
GND: C1.2 C2.2 C3.2 C4.2 D1.C D2.C D3.C D4.C JP1.2 S1.2 U1.2 U2.2 U3.2 U4.2
GND1: C5.2 C6.2 C7.2 C8.2 D5.C D6.C D7.C D8.C JP6.2 S2.2 U5.2 U6.2 U7.2 U8.2
GND2: C9.2 C10.2 C11.2 C12.2 D9.C D10.C D11.C D12.C JP9.2 S3.2 U9.2 U10.2 U11.2 U12.2
GND3: C13.2 C14.2 C15.2 C16.2 D13.C D14.C D15.C D16.C JP12.2 S4.2 U13.2 U14.2 U15.2 U16.2
GND4: C17.2 C18.2 C19.2 C20.2 D17.C D18.C D19.C D20.C JP15.2 S5.2 U17.2 U18.2 U19.2 U20.2
GND5: C21.2 C22.2 C23.2 C24.2 D21.C D22.C D23.C D24.C JP18.2 S6.2 U21.2 U22.2 U23.2 U24.2
GND6: C25.2 C26.2 C27.2 C28.2 D25.C D26.C D27.C D28.C JP21.2 S7.2 U25.2 U26.2 U27.2 U28.2
GND7: C29.2 C30.2 C31.2 C32.2 D29.C D30.C D31.C D32.C JP24.2 S8.2 U29.2 U30.2 U31.2 U32.2
GND8: C33.2 C34.2 C35.2 C36.2 D33.C D34.C D35.C D36.C JP27.2 S9.2 U33.2 U34.2 U35.2 U36.2
GND9: C37.2 C38.2 C39.2 C40.2 D37.C D38.C D39.C D40.C JP30.2 S10.2 U37.2 U38.2 U39.2 U40.2
GND10: C41.2 C42.2 C43.2 C44.2 D41.C D42.C D43.C D44.C JP33.2 S11.2 U41.2 U42.2 U43.2 U44.2
GND11: C45.2 C46.2 C47.2 C48.2 D45.C D46.C D47.C D48.C JP36.2 S12.2 U45.2 U46.2 U47.2 U48.2
GND12: C49.2 C50.2 C51.2 C52.2 D49.C D50.C D51.C D52.C JP39.2 S13.2 U49.2 U50.2 U51.2 U52.2
GND13: C53.2 C54.2 C55.2 C56.2 D53.C D54.C D55.C D56.C JP42.2 S14.2 U53.2 U54.2 U55.2 U56.2
GND14: C57.2 C58.2 C59.2 C60.2 D57.C D58.C D59.C D60.C JP45.2 S15.2 U57.2 U58.2 U59.2 U60.2
GND15: C61.2 C62.2 C63.2 C64.2 D61.C D62.C D63.C D64.C JP48.2 S16.2 U61.2 U62.2 U63.2 U64.2
GND16: C65.2 C66.2 C67.2 C68.2 D65.C D66.C D67.C D68.C JP51.2 S17.2 U65.2 U66.2 U67.2 U68.2
GND17: C69.2 C70.2 C71.2 C72.2 D69.C D70.C D71.C D72.C JP54.2 S18.2 U69.2 U70.2 U71.2 U72.2
GND18: C73.2 C74.2 C75.2 C76.2 D73.C D74.C D75.C D76.C JP57.2 S19.2 U73.2 U74.2 U75.2 U76.2
GND19: C77.2 C78.2 C79.2 C80.2 D77.C D78.C D79.C D80.C JP60.2 S20.2 U77.2 U78.2 U79.2 U80.2
GRN: JP2.3 R2.1
GRN1: JP5.3 R11.1
GRN2: JP8.3 R20.1
GRN3: JP11.3 R29.1
GRN4: JP14.3 R38.1
GRN5: JP17.3 R47.1
GRN6: JP20.3 R56.1
GRN7: JP23.3 R65.1
GRN8: JP26.3 R74.1
GRN9: JP29.3 R83.1
GRN10: JP32.3 R92.1
GRN11: JP35.3 R101.1
GRN12: JP38.3 R110.1
GRN13: JP41.3 R119.1
GRN14: JP44.3 R128.1
GRN15: JP47.3 R137.1
GRN16: JP50.3 R146.1
GRN17: JP53.3 R155.1
GRN18: JP56.3 R164.1
GRN19: JP59.3 R173.1
LFT: JP3.3 R8.2 U3.5
LFT1: JP4.3 R17.2 U7.5
LFT2: JP7.3 R26.2 U11.5
LFT3: JP10.3 R35.2 U15.5
LFT4: JP13.3 R44.2 U19.5
LFT5: JP16.3 R53.2 U23.5
LFT6: JP19.3 R62.2 U27.5
LFT7: JP22.3 R71.2 U31.5
LFT8: JP25.3 R80.2 U35.5
LFT9: JP28.3 R89.2 U39.5
LFT10: JP31.3 R98.2 U43.5
LFT11: JP34.3 R107.2 U47.5
LFT12: JP37.3 R116.2 U51.5
LFT13: JP40.3 R125.2 U55.5
LFT14: JP43.3 R134.2 U59.5
LFT15: JP46.3 R143.2 U63.5
LFT16: JP49.3 R152.2 U67.5
LFT17: JP52.3 R161.2 U71.5
LFT18: JP55.3 R170.2 U75.5
LFT19: JP58.3 R179.2 U79.5
N$1: D3.A R2.2
N$2: D2.A R3.2
N$3: D1.A R4.2
N$4: D4.A R1.2
N$5: D7.A R11.2
N$6: D6.A R12.2
N$7: D5.A R13.2
N$8: D8.A R10.2
N$9: D11.A R20.2
N$10: D10.A R21.2
N$11: D9.A R22.2
N$12: D12.A R19.2
N$13: D15.A R29.2
N$14: D14.A R30.2
N$15: D13.A R31.2
N$16: D16.A R28.2
N$17: D19.A R38.2
N$18: D18.A R39.2
N$19: D17.A R40.2
N$20: D20.A R37.2
N$21: D23.A R47.2
N$22: D22.A R48.2
N$23: D21.A R49.2
N$24: D24.A R46.2
N$25: D27.A R56.2
N$26: D26.A R57.2
N$27: D25.A R58.2
N$28: D28.A R55.2
N$29: D31.A R65.2
N$30: D30.A R66.2
N$31: D29.A R67.2
N$32: D32.A R64.2
N$33: D35.A R74.2
N$34: D34.A R75.2
N$35: D33.A R76.2
N$36: D36.A R73.2
N$37: D39.A R83.2
N$38: D38.A R84.2
N$39: D37.A R85.2
N$40: D40.A R82.2
N$41: D43.A R92.2
N$42: D42.A R93.2
N$43: D41.A R94.2
N$44: D44.A R91.2
N$45: D47.A R101.2
N$46: D46.A R102.2
N$47: D45.A R103.2
N$48: D48.A R100.2
N$49: D51.A R110.2
N$50: D50.A R111.2
N$51: D49.A R112.2
N$52: D52.A R109.2
N$53: D55.A R119.2
N$54: D54.A R120.2
N$55: D53.A R121.2
N$56: D56.A R118.2
N$57: D59.A R128.2
N$58: D58.A R129.2
N$59: D57.A R130.2
N$60: D60.A R127.2
N$61: D63.A R137.2
N$62: D62.A R138.2
N$63: D61.A R139.2
N$64: D64.A R136.2
N$65: D67.A R146.2
N$66: D66.A R147.2
N$67: D65.A R148.2
N$68: D68.A R145.2
N$69: D71.A R155.2
N$70: D70.A R156.2
N$71: D69.A R157.2
N$72: D72.A R154.2
N$73: D75.A R164.2
N$74: D74.A R165.2
N$75: D73.A R166.2
N$76: D76.A R163.2
N$77: D79.A R173.2
N$78: D78.A R174.2
N$79: D77.A R175.2
N$80: D80.A R172.2
RED: JP2.2 R3.1
RED1: JP5.2 R12.1
RED2: JP8.2 R21.1
RED3: JP11.2 R30.1
RED4: JP14.2 R39.1
RED5: JP17.2 R48.1
RED6: JP20.2 R57.1
RED7: JP23.2 R66.1
RED8: JP26.2 R75.1
RED9: JP29.2 R84.1
RED10: JP32.2 R93.1
RED11: JP35.2 R102.1
RED12: JP38.2 R111.1
RED13: JP41.2 R120.1
RED14: JP44.2 R129.1
RED15: JP47.2 R138.1
RED16: JP50.2 R147.1
RED17: JP53.2 R156.1
RED18: JP56.2 R165.1
RED19: JP59.2 R174.1
RHT: JP3.4 R9.2 U4.5
RHT1: JP4.4 R18.2 U8.5
RHT2: JP7.4 R27.2 U12.5
RHT3: JP10.4 R36.2 U16.5
RHT4: JP13.4 R45.2 U20.5
RHT5: JP16.4 R54.2 U24.5
RHT6: JP19.4 R63.2 U28.5
RHT7: JP22.4 R72.2 U32.5
RHT8: JP25.4 R81.2 U36.5
RHT9: JP28.4 R90.2 U40.5
RHT10: JP31.4 R99.2 U44.5
RHT11: JP34.4 R108.2 U48.5
RHT12: JP37.4 R117.2 U52.5
RHT13: JP40.4 R126.2 U56.5
RHT14: JP43.4 R135.2 U60.5
RHT15: JP46.4 R144.2 U64.5
RHT16: JP49.4 R153.2 U68.5
RHT17: JP52.4 R162.2 U72.5
RHT18: JP55.4 R171.2 U76.5
RHT19: JP58.4 R180.2 U80.5
UP: JP3.1 R6.2 U1.5
UP1: JP4.1 R15.2 U5.5
UP2: JP7.1 R24.2 U9.5
UP3: JP10.1 R33.2 U13.5
UP4: JP13.1 R42.2 U17.5
UP5: JP16.1 R51.2 U21.5
UP6: JP19.1 R60.2 U25.5
UP7: JP22.1 R69.2 U29.5
UP8: JP25.1 R78.2 U33.5
UP9: JP28.1 R87.2 U37.5
UP10: JP31.1 R96.2 U41.5
UP11: JP34.1 R105.2 U45.5
UP12: JP37.1 R114.2 U49.5
UP13: JP40.1 R123.2 U53.5
UP14: JP43.1 R132.2 U57.5
UP15: JP46.1 R141.2 U61.5
UP16: JP49.1 R150.2 U65.5
UP17: JP52.1 R159.2 U69.5
UP18: JP55.1 R168.2 U73.5
UP19: JP58.1 R177.2 U77.5
VCC: C1.1 C2.1 C3.1 C4.1 JP1.1 R5.1 R6.1 R7.1 R8.1 R9.1 U1.4 U2.4 U3.4 U4.4
VCC1: C5.1 C6.1 C7.1 C8.1 JP6.1 R14.1 R15.1 R16.1 R17.1 R18.1 U5.4 U6.4 U7.4 U8.4
VCC2: C9.1 C10.1 C11.1 C12.1 JP9.1 R23.1 R24.1 R25.1 R26.1 R27.1 U9.4 U10.4 U11.4 U12.4
VCC3: C13.1 C14.1 C15.1 C16.1 JP12.1 R32.1 R33.1 R34.1 R35.1 R36.1 U13.4 U14.4 U15.4 U16.4
VCC4: C17.1 C18.1 C19.1 C20.1 JP15.1 R41.1 R42.1 R43.1 R44.1 R45.1 U17.4 U18.4 U19.4 U20.4
VCC5: C21.1 C22.1 C23.1 C24.1 JP18.1 R50.1 R51.1 R52.1 R53.1 R54.1 U21.4 U22.4 U23.4 U24.4
VCC6: C25.1 C26.1 C27.1 C28.1 JP21.1 R59.1 R60.1 R61.1 R62.1 R63.1 U25.4 U26.4 U27.4 U28.4
VCC7: C29.1 C30.1 C31.1 C32.1 JP24.1 R68.1 R69.1 R70.1 R71.1 R72.1 U29.4 U30.4 U31.4 U32.4
VCC8: C33.1 C34.1 C35.1 C36.1 JP27.1 R77.1 R78.1 R79.1 R80.1 R81.1 U33.4 U34.4 U35.4 U36.4
VCC9: C37.1 C38.1 C39.1 C40.1 JP30.1 R86.1 R87.1 R88.1 R89.1 R90.1 U37.4 U38.4 U39.4 U40.4
VCC10: C41.1 C42.1 C43.1 C44.1 JP33.1 R95.1 R96.1 R97.1 R98.1 R99.1 U41.4 U42.4 U43.4 U44.4
VCC11: C45.1 C46.1 C47.1 C48.1 JP36.1 R104.1 R105.1 R106.1 R107.1 R108.1 U45.4 U46.4 U47.4 U48.4
VCC12: C49.1 C50.1 C51.1 C52.1 JP39.1 R113.1 R114.1 R115.1 R116.1 R117.1 U49.4 U50.4 U51.4 U52.4
VCC13: C53.1 C54.1 C55.1 C56.1 JP42.1 R122.1 R123.1 R124.1 R125.1 R126.1 U53.4 U54.4 U55.4 U56.4
VCC14: C57.1 C58.1 C59.1 C60.1 JP45.1 R131.1 R132.1 R133.1 R134.1 R135.1 U57.4 U58.4 U59.4 U60.4
VCC15: C61.1 C62.1 C63.1 C64.1 JP48.1 R140.1 R141.1 R142.1 R143.1 R144.1 U61.4 U62.4 U63.4 U64.4
VCC16: C65.1 C66.1 C67.1 C68.1 JP51.1 R149.1 R150.1 R151.1 R152.1 R153.1 U65.4 U66.4 U67.4 U68.4
VCC17: C69.1 C70.1 C71.1 C72.1 JP54.1 R158.1 R159.1 R160.1 R161.1 R162.1 U69.4 U70.4 U71.4 U72.4
VCC18: C73.1 C74.1 C75.1 C76.1 JP57.1 R167.1 R168.1 R169.1 R170.1 R171.1 U73.4 U74.4 U75.4 U76.4
VCC19: C77.1 C78.1 C79.1 C80.1 JP60.1 R176.1 R177.1 R178.1 R179.1 R180.1 U77.4 U78.4 U79.4 U80.4
WHT: JP2.4 R1.1
WHT1: JP5.4 R10.1
WHT2: JP8.4 R19.1
WHT3: JP11.4 R28.1
WHT4: JP14.4 R37.1
WHT5: JP17.4 R46.1
WHT6: JP20.4 R55.1
WHT7: JP23.4 R64.1
WHT8: JP26.4 R73.1
WHT9: JP29.4 R82.1
WHT10: JP32.4 R91.1
WHT11: JP35.4 R100.1
WHT12: JP38.4 R109.1
WHT13: JP41.4 R118.1
WHT14: JP44.4 R127.1
WHT15: JP47.4 R136.1
WHT16: JP50.4 R145.1
WHT17: JP53.4 R154.1
WHT18: JP56.4 R163.1
WHT19: JP59.4 R172.1

## Tracks (layer width: path | path; a pad name or v marks a point on that pad's centre or on a via)
BLU  (via drill 0.51)
  Top 0.254: v15.75,15.11 15.75,16.18 15.32,16.61 14.49,16.61 R4.1
  Bottom 0.254: v15.75,15.11 15.75,14.48 22.1,8.13 27.18,8.13 30.99,11.94 30.99,20.83 29.72,22.1 29.72,25.91 JP2.1
BLU1  (via drill 0.51)
  Top 0.254: v44.2,15.11 44.2,16.18 43.76,16.61 42.94,16.61 R13.1
  Bottom 0.254: v44.2,15.11 44.2,14.48 50.55,8.13 55.63,8.13 59.44,11.94 59.44,20.83 58.17,22.1 58.17,25.91 JP5.1
BLU2  (via drill 0.51)
  Top 0.254: v72.64,15.11 72.64,16.18 72.21,16.61 71.39,16.61 R22.1
  Bottom 0.254: v72.64,15.11 72.64,14.48 78.99,8.13 84.07,8.13 87.88,11.94 87.88,20.83 86.61,22.1 86.61,25.91 JP8.1
BLU3  (via drill 0.51)
  Top 0.254: v101.09,15.11 101.09,16.18 100.66,16.61 99.84,16.61 R31.1
  Bottom 0.254: v101.09,15.11 101.09,14.48 107.44,8.13 112.52,8.13 116.33,11.94 116.33,20.83 115.06,22.1 115.06,25.91 JP11.1
BLU4  (via drill 0.51)
  Top 0.254: v15.75,39.75 15.75,40.82 15.32,41.25 14.49,41.25 R40.1
  Bottom 0.254: v15.75,39.75 15.75,39.12 22.1,32.77 27.18,32.77 30.99,36.58 30.99,45.47 29.72,46.74 29.72,50.55 JP14.1
BLU5  (via drill 0.51)
  Top 0.254: v44.2,39.75 44.2,40.82 43.76,41.25 R49.1
  Bottom 0.254: v44.2,39.75 44.2,39.12 50.55,32.77 55.63,32.77 59.44,36.58 59.44,45.47 58.17,46.74 58.17,50.55 JP17.1
BLU6  (via drill 0.51)
  Top 0.254: v72.64,39.75 72.64,40.82 72.21,41.25 71.39,41.25 R58.1
  Bottom 0.254: v72.64,39.75 72.64,39.12 78.99,32.77 84.07,32.77 87.88,36.58 87.88,45.47 86.61,46.74 86.61,50.55 JP20.1
BLU7  (via drill 0.51)
  Top 0.254: v101.09,39.75 101.09,40.82 100.66,41.25 99.84,41.25 R67.1
  Bottom 0.254: v101.09,39.75 101.09,39.12 107.44,32.77 112.52,32.77 116.33,36.58 116.33,45.47 115.06,46.74 115.06,50.55 JP23.1
BLU8  (via drill 0.51)
  Top 0.254: v15.75,64.39 15.75,65.46 15.32,65.89 14.49,65.89 R76.1
  Bottom 0.254: v15.75,64.39 15.75,63.75 22.1,57.4 27.18,57.4 30.99,61.21 30.99,70.1 29.72,71.37 29.72,75.18 JP26.1
BLU9  (via drill 0.51)
  Top 0.254: v44.2,64.39 44.2,65.46 43.76,65.89 42.94,65.89 R85.1
  Bottom 0.254: v44.2,64.39 44.2,63.75 50.55,57.4 55.63,57.4 59.44,61.21 59.44,70.1 58.17,71.37 58.17,75.18 JP29.1
BLU10  (via drill 0.51)
  Top 0.254: v72.64,64.39 72.64,65.46 72.21,65.89 71.39,65.89 R94.1
  Bottom 0.254: v72.64,64.39 72.64,63.75 78.99,57.4 84.07,57.4 87.88,61.21 87.88,70.1 86.61,71.37 86.61,75.18 JP32.1
BLU11  (via drill 0.51)
  Top 0.254: v101.09,64.39 101.09,65.46 100.66,65.89 99.84,65.89 R103.1
  Bottom 0.254: v101.09,64.39 101.09,63.75 107.44,57.4 112.52,57.4 116.33,61.21 116.33,70.1 115.06,71.37 115.06,75.18 JP35.1
BLU12  (via drill 0.51)
  Top 0.254: v15.75,89.03 15.75,90.09 15.32,90.53 14.49,90.53 R112.1
  Bottom 0.254: v15.75,89.03 15.75,88.39 22.1,82.04 27.18,82.04 30.99,85.85 30.99,94.74 29.72,96.01 29.72,99.82 JP38.1
BLU13  (via drill 0.51)
  Top 0.254: v44.2,89.03 44.2,90.09 43.76,90.53 42.94,90.53 R121.1
  Bottom 0.254: v44.2,89.03 44.2,88.39 50.55,82.04 55.63,82.04 59.44,85.85 59.44,94.74 58.17,96.01 58.17,99.82 JP41.1
BLU14  (via drill 0.51)
  Top 0.254: v72.64,89.03 72.64,90.09 72.21,90.53 71.39,90.53 R130.1
  Bottom 0.254: v72.64,89.03 72.64,88.39 78.99,82.04 84.07,82.04 87.88,85.85 87.88,94.74 86.61,96.01 86.61,99.82 JP44.1
BLU15  (via drill 0.51)
  Top 0.254: v101.09,89.03 101.09,90.09 100.66,90.53 99.84,90.53 R139.1
  Bottom 0.254: v101.09,89.03 101.09,88.39 107.44,82.04 112.52,82.04 116.33,85.85 116.33,94.74 115.06,96.01 115.06,99.82 JP47.1
BLU16  (via drill 0.51)
  Top 0.254: v15.75,113.67 15.75,114.73 15.32,115.16 14.49,115.16 R148.1
  Bottom 0.254: v15.75,113.67 15.75,113.03 22.1,106.68 27.18,106.68 30.99,110.49 30.99,119.38 29.72,120.65 29.72,124.46 JP50.1
BLU17  (via drill 0.51)
  Top 0.254: v44.2,113.67 44.2,114.73 43.76,115.16 42.94,115.16 R157.1
  Bottom 0.254: v44.2,113.67 44.2,113.03 50.55,106.68 55.63,106.68 59.44,110.49 59.44,119.38 58.17,120.65 58.17,124.46 JP53.1
BLU18  (via drill 0.51)
  Top 0.254: v72.64,113.67 72.64,114.73 72.21,115.16 71.39,115.16 R166.1
  Bottom 0.254: v72.64,113.67 72.64,113.03 78.99,106.68 84.07,106.68 87.88,110.49 87.88,119.38 86.61,120.65 86.61,124.46 JP56.1
BLU19  (via drill 0.51)
  Top 0.254: v101.09,113.67 101.09,114.73 100.66,115.16 99.84,115.16 R175.1
  Bottom 0.254: v101.09,113.67 101.09,113.03 107.44,106.68 112.52,106.68 116.33,110.49 116.33,119.38 115.06,120.65 115.06,124.46 JP59.1
BTN  (via drill 0.51)
  Top 0.254: 12.8,16.65 R5.2 | v11.56,15.77 11.56,16.21 11.98,16.63 12.82,16.63 R5.2 | R5.2 12.88,16.67 12.88,17.55 13.13,17.8 16.3,17.8 S1.1
  Bottom 0.254: JP1.3 13.21,17.42 v11.56,15.77
BTN1  (via drill 0.51)
  Top 0.254: 41.25,16.65 R14.2 | v40.01,15.77 40.01,16.21 40.43,16.63 41.26,16.63 R14.2 | R14.2 41.33,16.67 41.33,17.55 41.58,17.8 44.74,17.8 S2.1
  Bottom 0.254: JP6.3 41.66,17.42 v40.01,15.77
BTN2  (via drill 0.51)
  Top 0.254: 69.69,16.65 R23.2 | v68.45,15.77 68.45,16.21 68.88,16.63 69.71,16.63 R23.2 | R23.2 69.77,16.67 69.77,17.55 70.03,17.8 73.19,17.8 S3.1
  Bottom 0.254: JP9.3 70.1,17.42 v68.45,15.77
BTN3  (via drill 0.51)
  Top 0.254: 98.14,16.65 R32.2 | v96.9,15.77 96.9,16.21 97.32,16.63 98.16,16.63 R32.2 | R32.2 98.22,16.67 98.22,17.55 98.48,17.8 101.64,17.8 S4.1
  Bottom 0.254: JP12.3 98.55,17.42 v96.9,15.77
BTN4  (via drill 0.51)
  Top 0.254: 12.8,41.29 R41.2 | v11.56,40.41 11.56,40.85 11.98,41.27 12.82,41.27 R41.2 | R41.2 12.88,41.31 12.88,42.19 13.13,42.44 16.3,42.44 S5.1
  Bottom 0.254: JP15.3 13.21,42.06 v11.56,40.41
BTN5  (via drill 0.51)
  Top 0.254: 41.25,41.29 R50.2 | v40.01,40.41 40.01,40.85 40.43,41.27 41.26,41.27 R50.2 | R50.2 41.33,41.31 41.33,42.19 41.58,42.44 44.74,42.44 S6.1
  Bottom 0.254: JP18.3 41.66,42.06 v40.01,40.41
BTN6  (via drill 0.51)
  Top 0.254: 69.69,41.29 R59.2 | v68.45,40.41 68.45,40.85 68.88,41.27 69.71,41.27 R59.2 | R59.2 69.77,41.31 69.77,42.19 70.03,42.44 73.19,42.44 S7.1
  Bottom 0.254: JP21.3 70.1,42.06 v68.45,40.41
BTN7  (via drill 0.51)